# Altium PCB PCB2.PcbDoc (part 1 of 2)
Units mm, origin at the board's own origin, x right, y up, seen from the top; angles counter-clockwise.
Board outline 46.9 x 46.9 mm, 4 copper layers (Top Layer, Internal Plane 1, Signal Layer 2, Bottom Layer), stack 0.778 mm thick; 115 components, 66 nets, 371 pads, 999 vias.
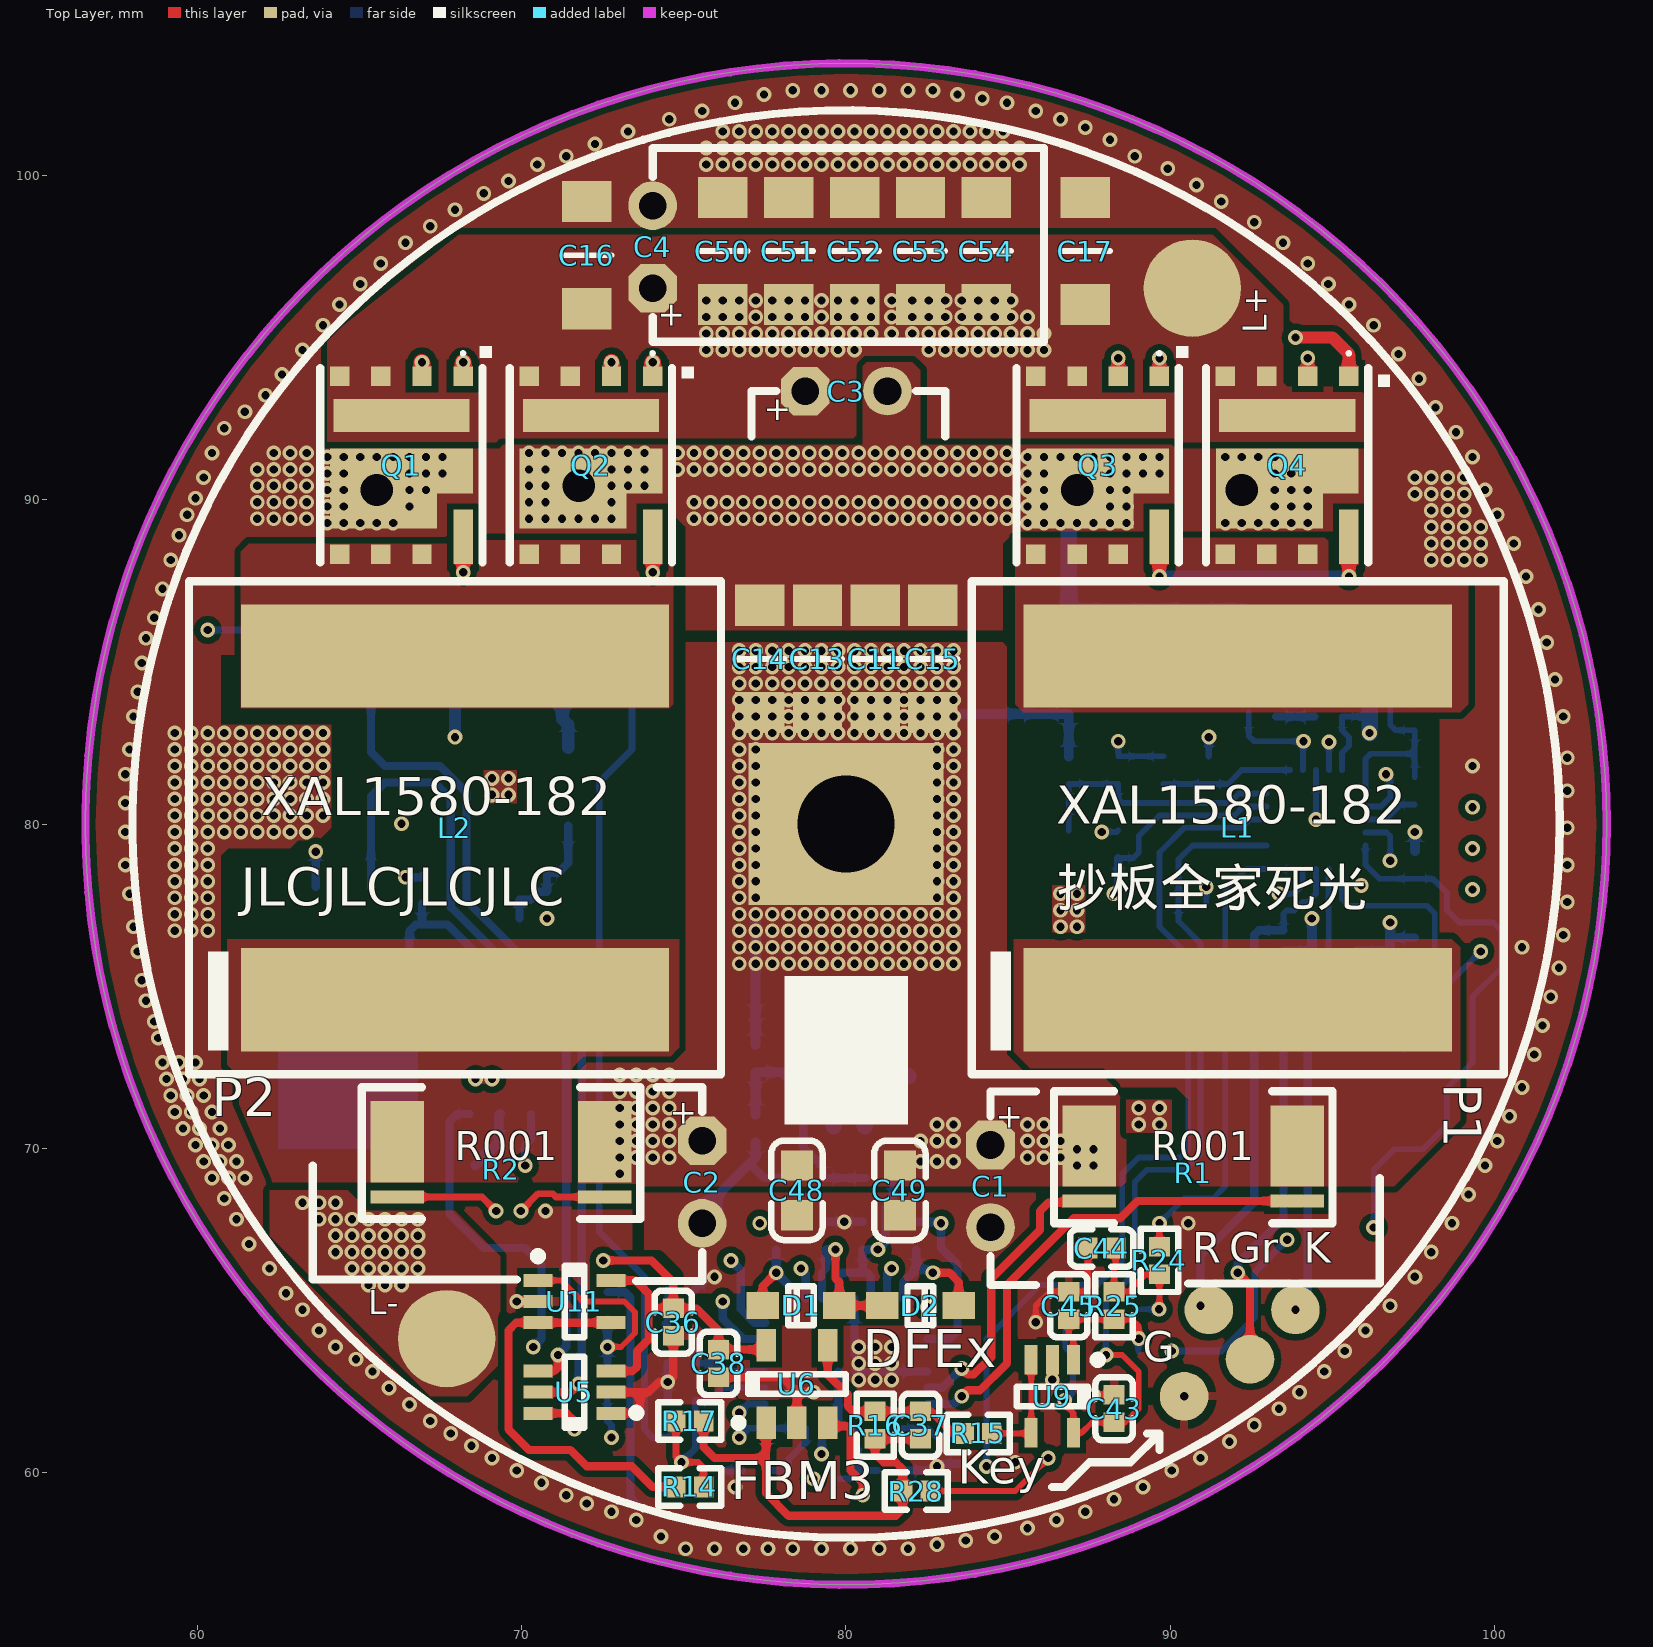
[diagram p0: Top Layer view]
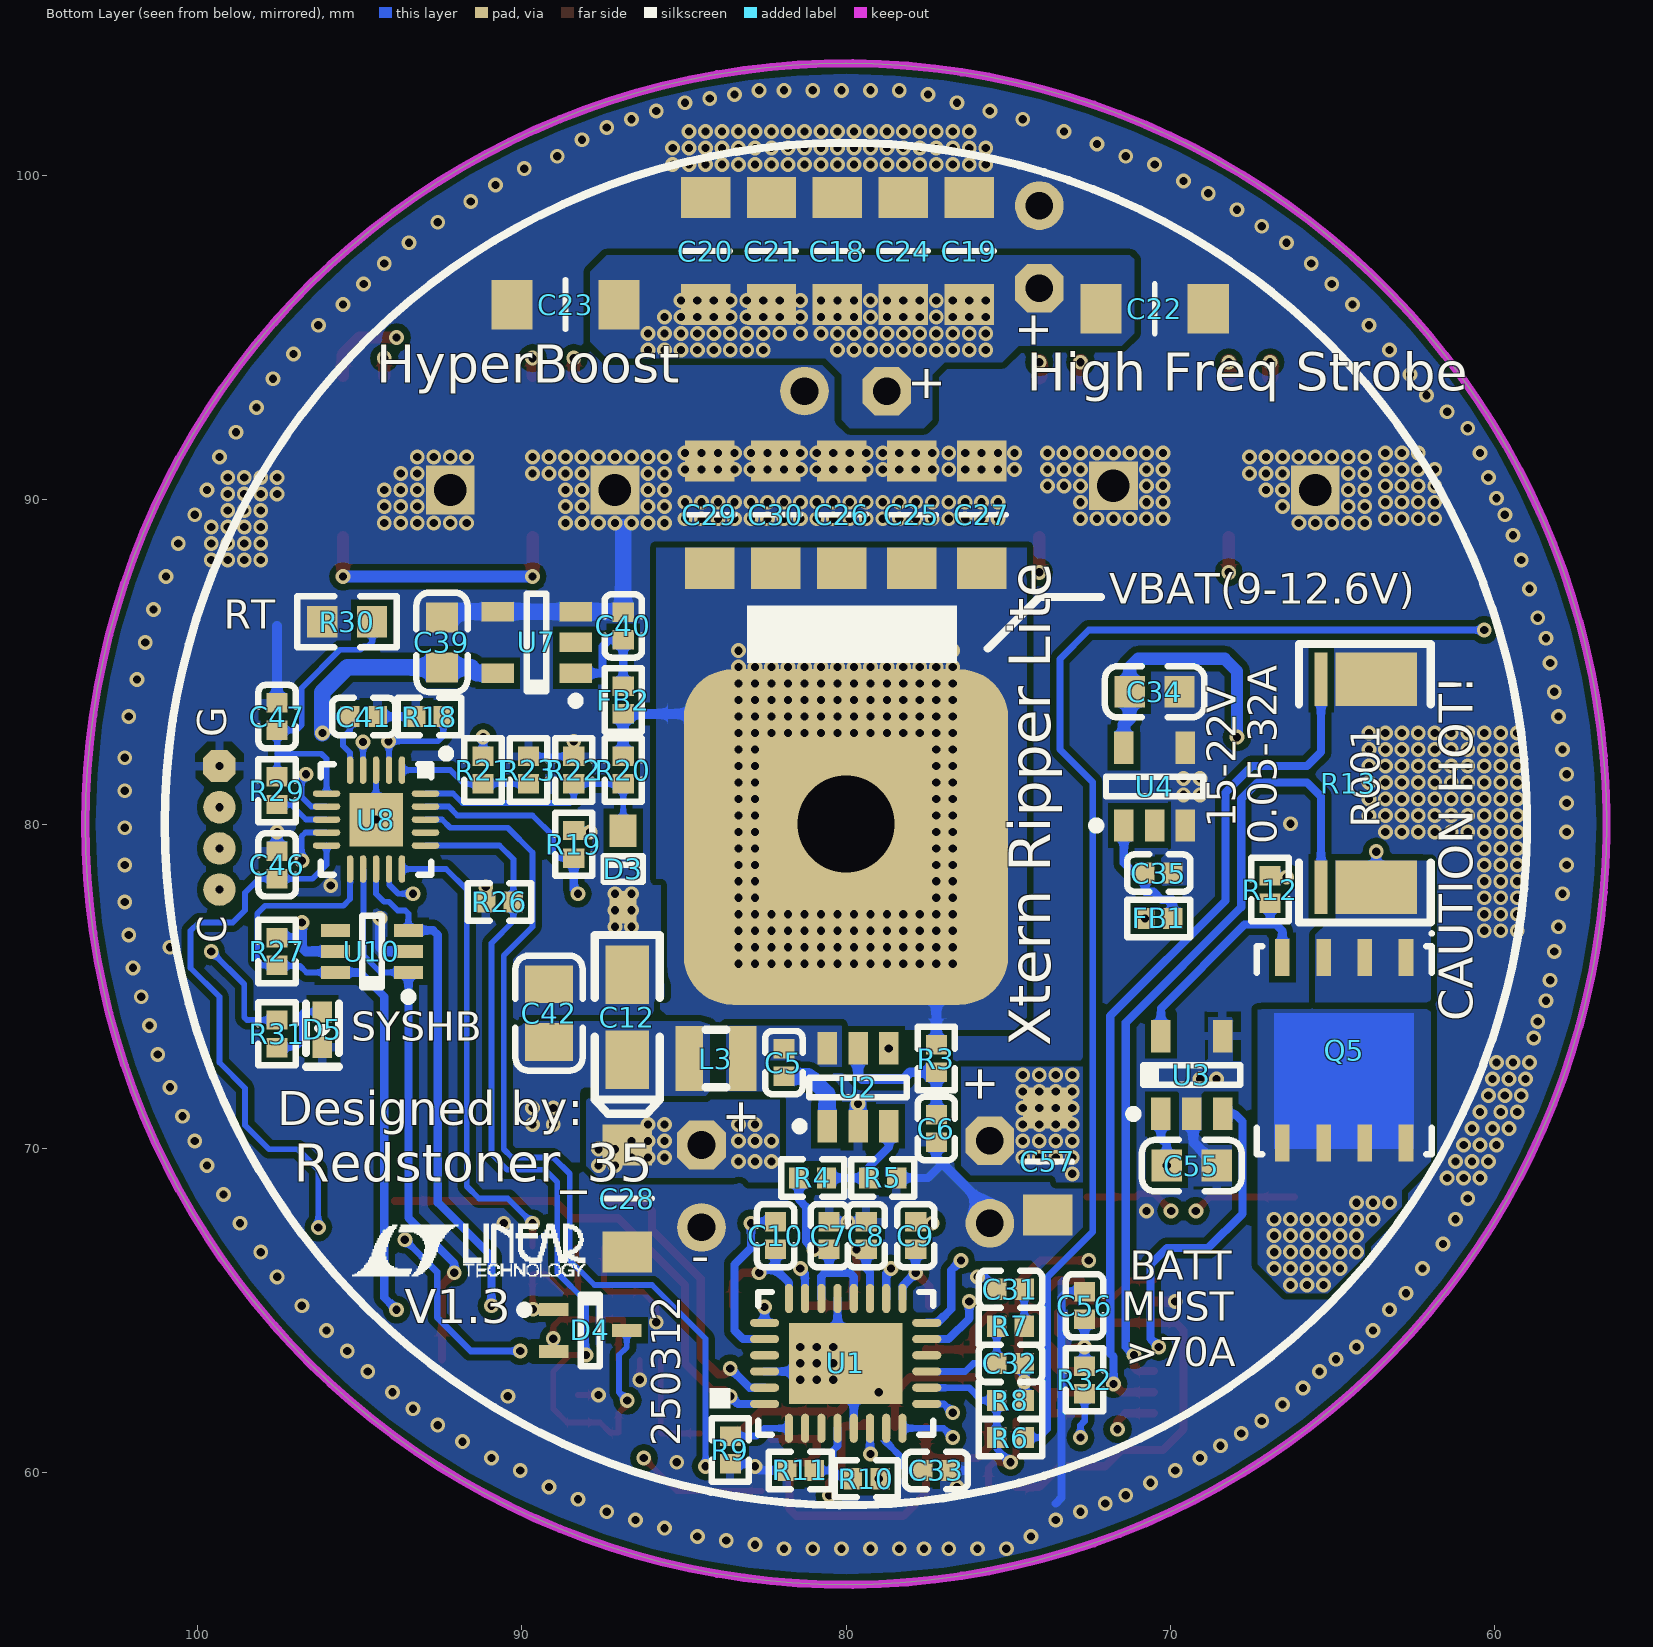
[diagram p1: Bottom Layer view, seen from below]
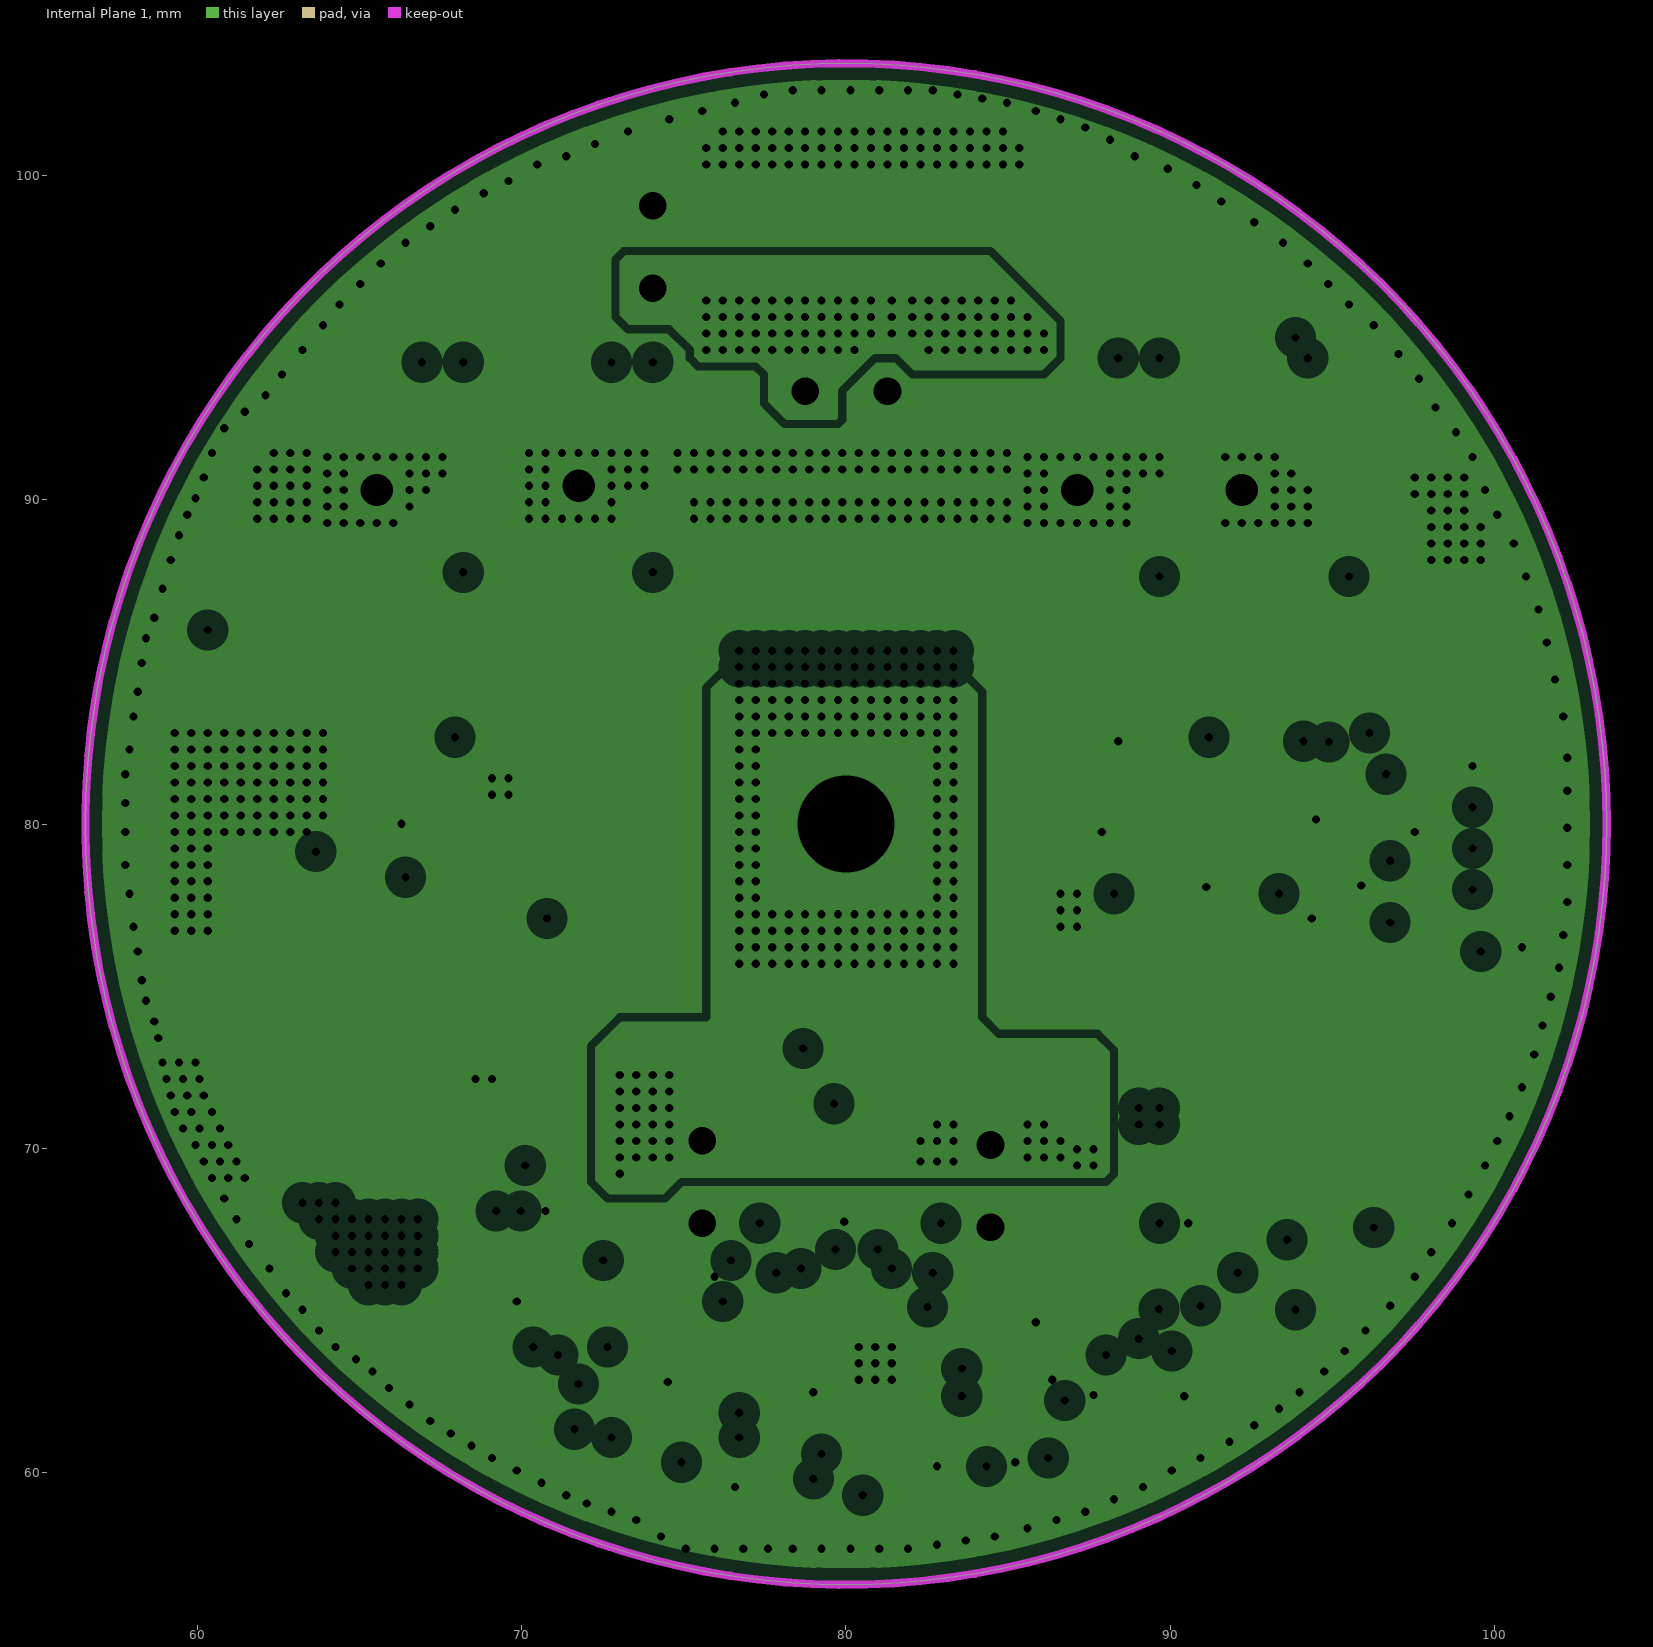
[diagram p2: Internal Plane 1, clearances drawn from the general rule]
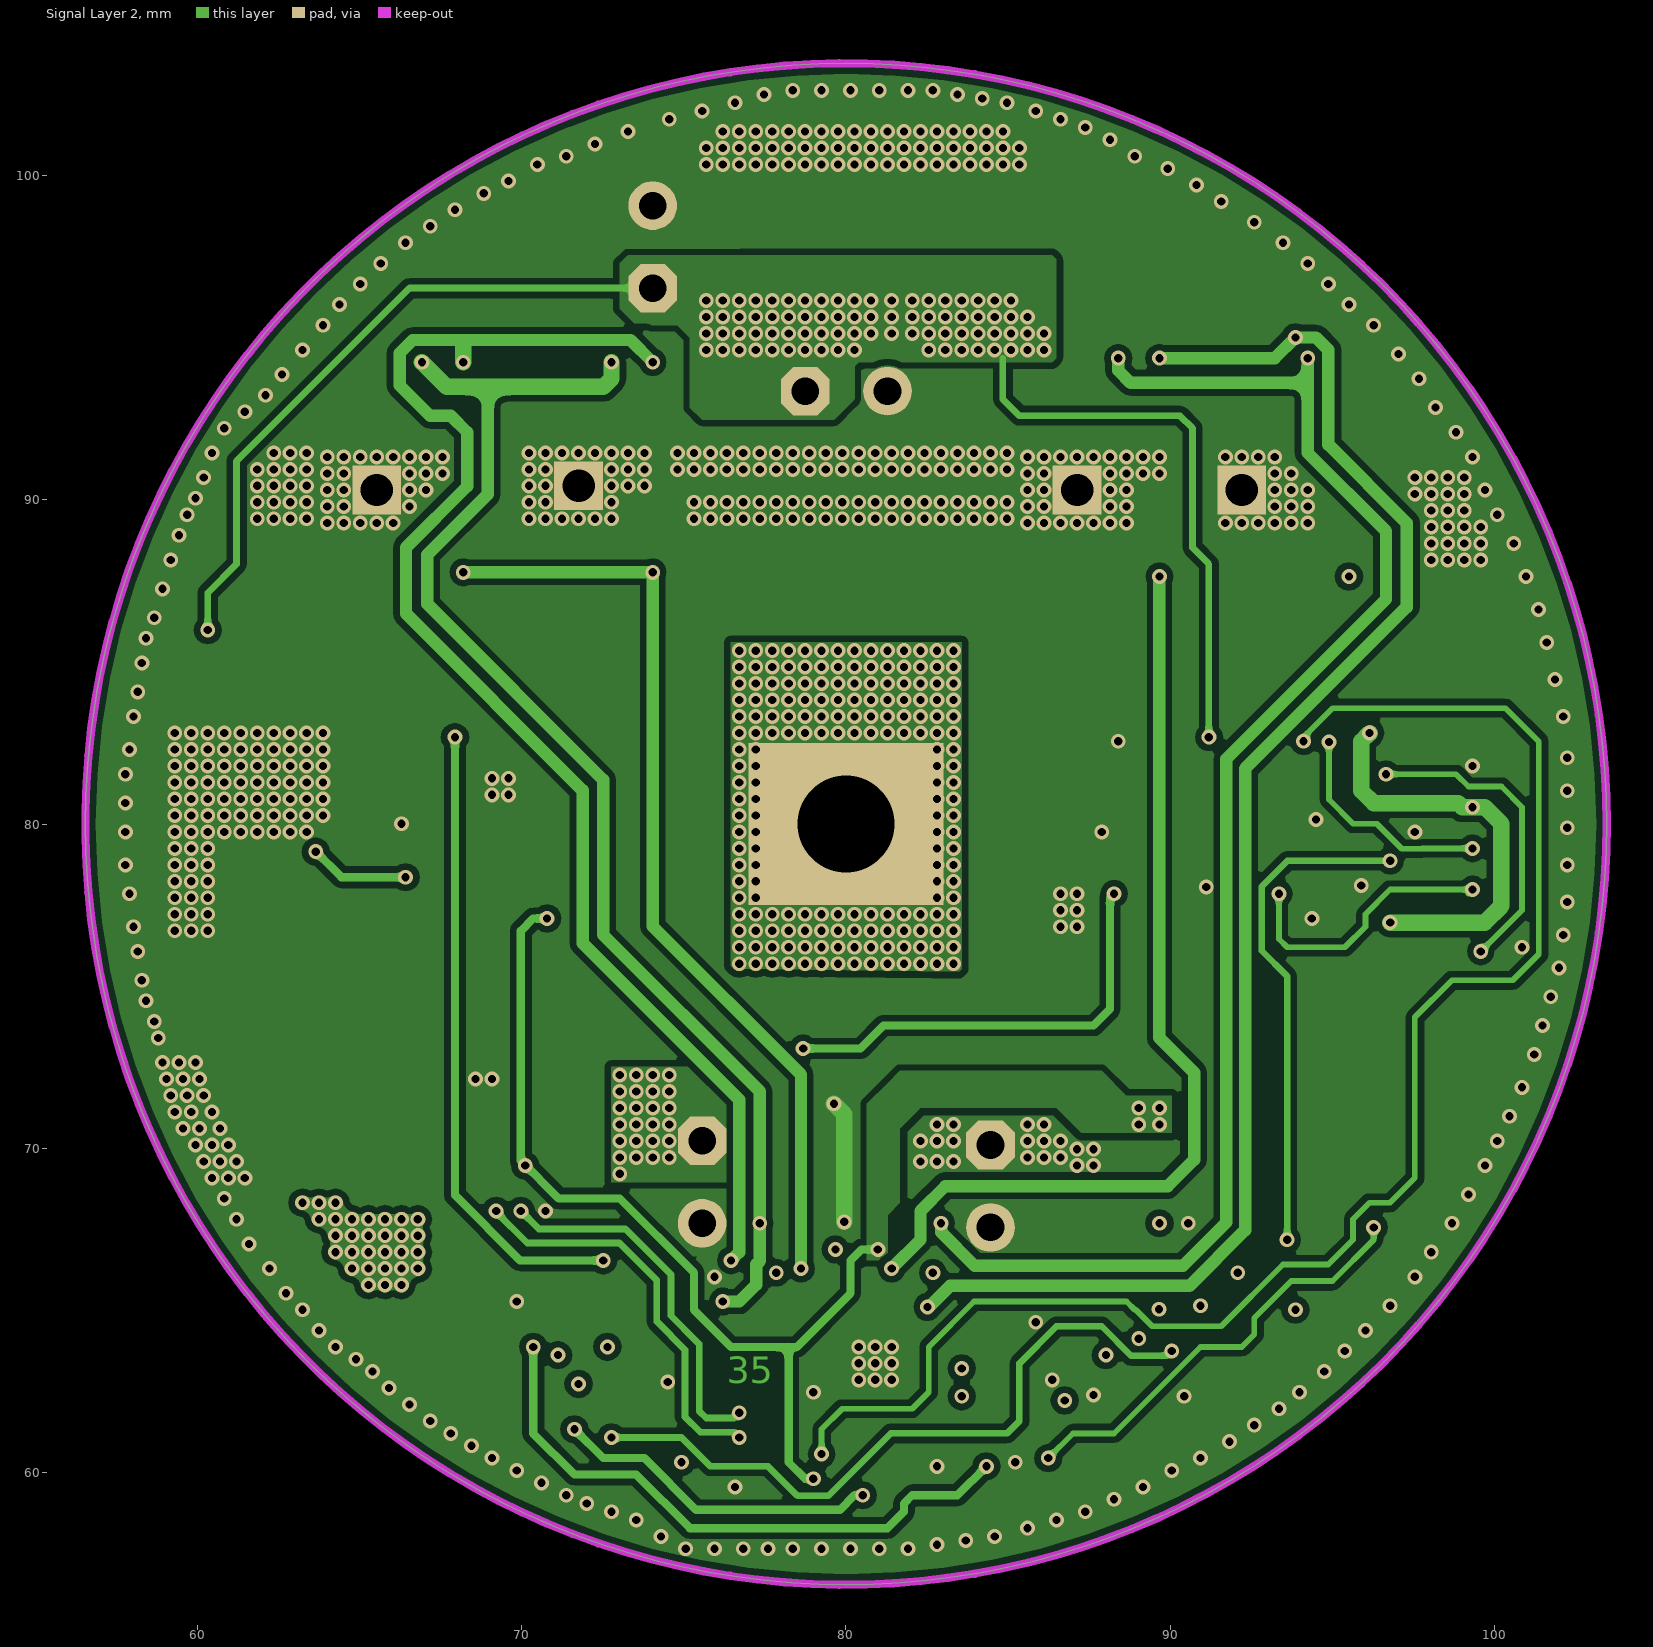
[diagram p3: Signal Layer 2]
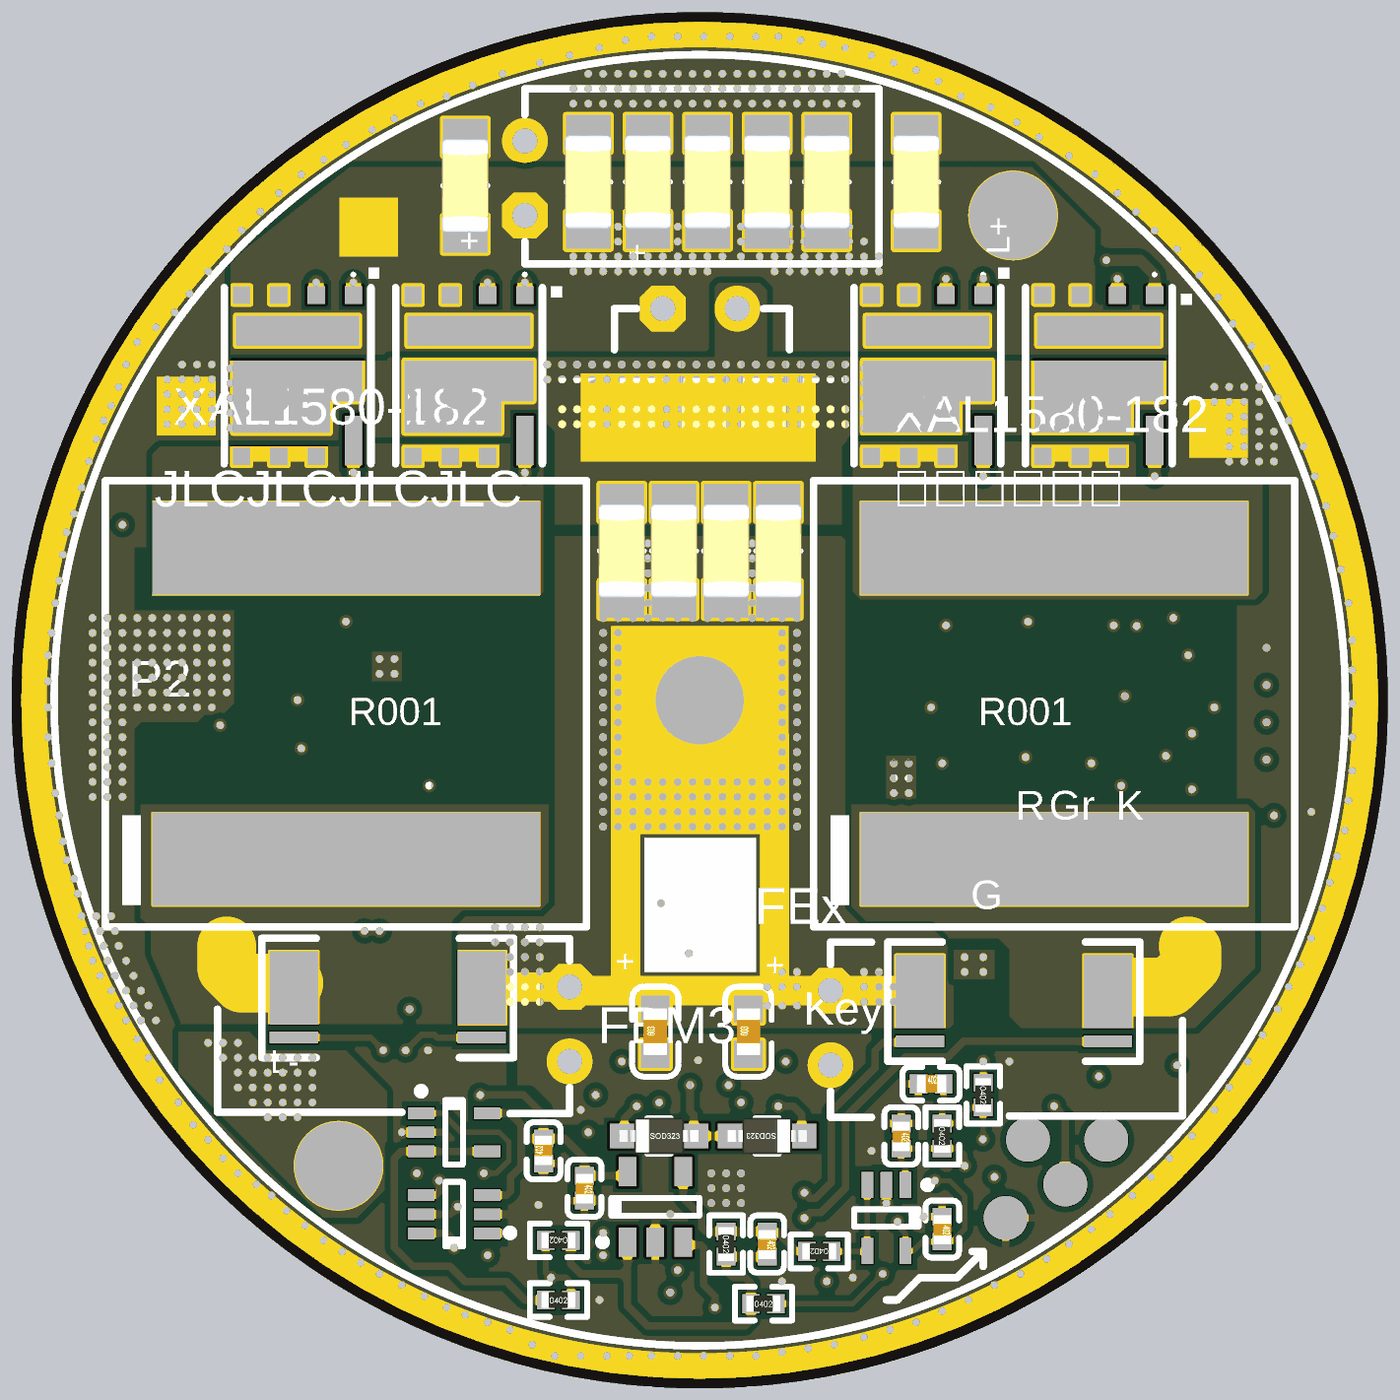
[diagram p5: 3D render of the assembled board from above, using the file's embedded part models]
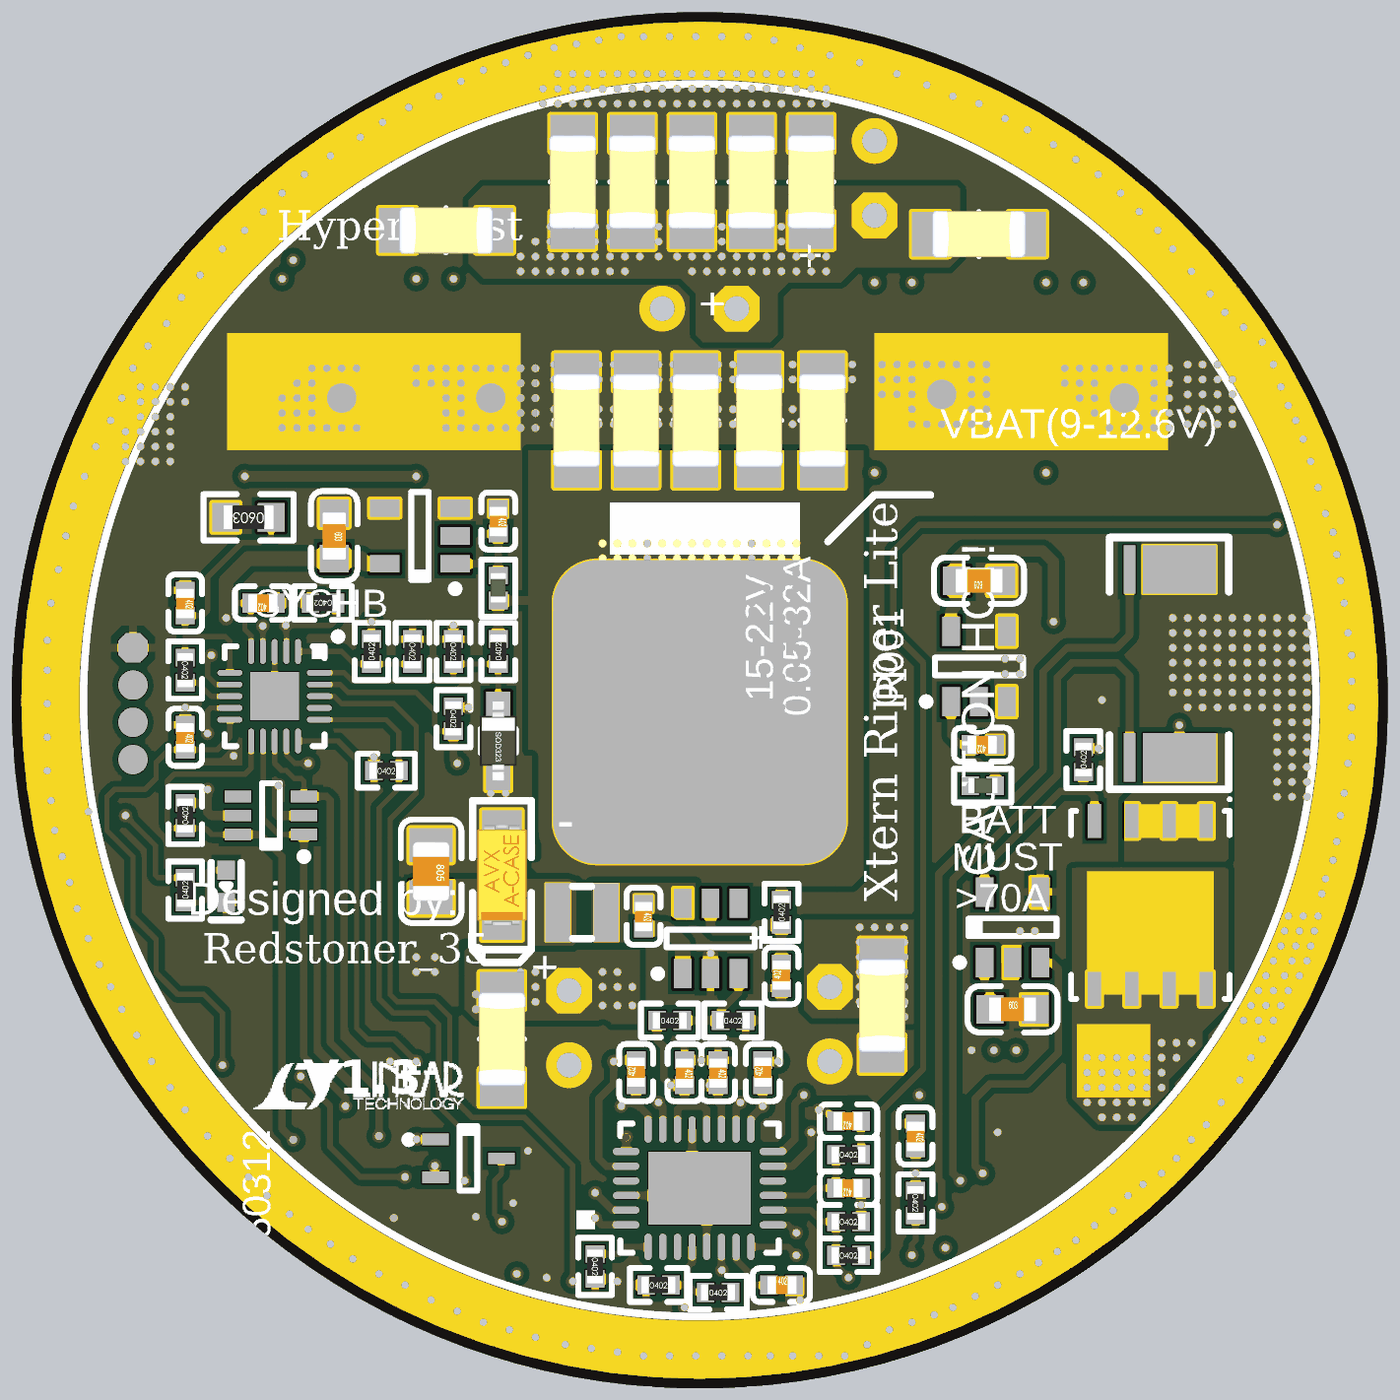
[diagram p6: 3D render of the assembled board from below, using the file's embedded part models]

## Layer stack, top to bottom
Top Solder: solder mask 0.0102, Solder Resist, Dk 3.5
Top Layer: signal copper 0.0356
Dielectric 1: core 0.254, FR-4, Dk 4.2
Internal Plane 1: plane copper 0.036
Dielectric 3: prepreg 0.127, Dk 4.2
Signal Layer 2: signal copper 0.036
Dielectric 2: core 0.254, Dk 4.2
Bottom Layer: signal copper 0.0356
Bottom Solder: solder mask 0.0102, Solder Resist, Dk 3.5

## Board outline
80,56.55 cw(c80,80) 56.55,80 cw(c80,80) 80,103.45 cw(c80,80) 103.45,80 cw(c80,80)

## Design rules (kind name [scope] priority, off if disabled: settings)
Clearance [All] p1: gap=0.2
DiffPairsRouting [All] p1: maxlimit=0.254 minlimit=0.203 mostfreqgap=0.229 toplayer_minwidth=0.203 toplayer_maxwidth=0.254 toplayer_prefwidth=0.254 midlayer2_minwidth=0.203 midlayer2_maxwidth=0.254 midlayer2_prefwidth=0.254 bottomlayer_minwidth=0.203 bottomlayer_maxwidth=0.254 bottomlayer_prefwidth=0.254 maxuncoupledlength=12.7
PlaneClearance [All] p1: clearance=0.508
PlaneConnect [All] p1: planeconnectstyle=Direct reliefexpansion=0.508 reliefentries=4 reliefconductorwidth=0.254 reliefairgap=0.254
PolygonConnect PolygonConnect_1 [IsVia] p1: connectstyle=Direct reliefconductorwidth=0.254 reliefentries=4 polygonreliefangle="90 Angle" airgapwidth=0.254
PolygonConnect [All] p2: connectstyle=Direct reliefconductorwidth=0.254 reliefentries=4 polygonreliefangle="90 Angle" airgapwidth=0.254
RoomDefinition main [InComponentClass('main')] p1: confinementstyle=ConfineIn formatcopy=TRUE lockcomponents=FALSE outline 178.943,26.924 244.983,26.924 244.983,46.482 178.943,46.482
RoutingVias [All] p1: holewidth=0.711 width=1.27 viastyle="Through Hole" minholewidth=0.711 minwidth=1.27 maxholewidth=0.711 maxwidth=1.27
SolderMaskExpansion [All] p1: expansion=0.102
Width [All] p1: maxlimit=5 minlimit=0.178 preferedwidth=0.254
27 further rules are at their usual default settings.

## Classes and differential pairs
differential pair LARGEIS: +LARGEIS_P -LARGEIS_N
differential pair IS1: +IS1_P -IS1_N
differential pair IS2: +IS2_P -IS2_N

## Components (designator, comment, footprint, x,y, rotation, side; value= is the part's Value field where it differs from the comment)
C1 "SPT1CM681F14OR" ElecCap_Hori#1 84.455,68.834 r0 top
C2 "SPT1CM681F14OR" ElecCap_Hori#2 75.565,68.961 r180 top
C3 "25V680uF BC" ElecCap_Hori#2 80.01,93.345 r270 top
C4 "PA25V470M6x12" ElecCap_Hori#2 74.041,97.79 r0 top
C5 "100nF (104) 10% 16V" 0402_C 81.915,72.644 r270 bottom
C6 "1.0uF (105) 10% 25V" 0402_C 77.216,70.612 r90 bottom
C7 "100nF (104) 10% 16V" 0402_C 80.518,67.31 r270 bottom
C8 "10uF (106) 20% 10V" 0402_C 79.375,67.31 r270 bottom
C9 "220nF (224) 10% 16V" 0402_C 77.851,67.31 r90 bottom
C10 "220nF (224) 10% 16V" 0402_C 82.169,67.31 r90 bottom
C11 "EMK316BBJ476ML-T" 1206C 80.899,85.09 r270 top
C12 "10uF (106) ±10% 16V" CASE-A_3216 86.741,74.041 r270 bottom
C13 "EMK316BBJ476ML-T" 1206C 79.121,85.09 r270 top
C14 "EMK316BBJ476ML-T" 1206C 77.343,85.09 r270 top
C15 "EMK316BBJ476ML-T" 1206C 82.677,85.09 r270 top
C16 "C3216X5R1V226M160AC" 1206C 72.009,97.536 r270 top
C17 "C3216X5R1V226M160AC" 1206C 87.376,97.663 r270 top
C18 "C3216X5R1V226M160AC" 1206C 80.264,97.663 r270 bottom
C19 "C3216X5R1V226M160AC" 1206C 76.2,97.663 r270 bottom
C20 "C3216X5R1V226M160AC" 1206C 84.328,97.663 r270 bottom
C21 "C3216X5R1V226M160AC" 1206C 82.296,97.663 r270 bottom
C22 "C3216X5R1V226M160AC" 1206C 70.485,95.885 r0 bottom
C23 "C3216X5R1V226M160AC" 1206C 88.646,96.012 r180 bottom
C24 "C3216X5R1V226M160AC" 1206C 78.232,97.663 r270 bottom
C25 "EMK316BBJ476ML-T" 1206C 77.978,89.535 r270 bottom
C26 "EMK316BBJ476ML-T" 1206C 80.137,89.535 r270 bottom
C27 "EMK316BBJ476ML-T" 1206C 75.819,89.535 r270 bottom
C28 "EMK316BBJ476ML-T" 1206C 86.741,68.453 r90 bottom
C29 "EMK316BBJ476ML-T" 1206C 84.201,89.535 r270 bottom
C30 "EMK316BBJ476ML-T" 1206C 82.169,89.535 r270 bottom
C31 "6.8nF (682) 10% 50V" 0402_C 74.93,65.659 r0 bottom
C32 "1.2nF (122) 5% 50V" 0402_C 74.93,63.373 r0 bottom
C33 "47nF (473) 10% 50V" 0402_C 77.216,60.071 r180 bottom
C34 "10uF (106) 10% 10V" 0603_C 70.485,84.074 r0 bottom
C35 "100nF (104) 10% 16V" 0402_C 70.358,78.486 r0 bottom
C36 "100nF (104) 10% 16V" 0402_C 74.676,64.643 r90 top
C37 "150nF (154) 10% 16V" 0402_C 82.296,61.468 r270 top
C38 "100nF (104) 10% 16V" 0402_C 76.073,63.373 r270 top
C39 "10uF (106) 10% 10V" 0603_C 92.456,85.598 r270 bottom
C40 "100nF (104) 10% 16V" 0402_C 86.868,86.106 r270 bottom
C41 "100nF (104) 10% 16V" 0402_C 94.869,83.312 r0 bottom
C42 "22uF (226) 20% 25V" 0805_C 89.154,74.168 r270 bottom
C43 "100nF (104) 10% 16V" 0402_C 88.265,61.976 r270 top
C44 "1.0uF (105) 10% 25V" 0402_C 87.884,66.929 r0 top
C45 "1.0uF (105) 10% 25V" 0402_C 86.868,65.151 r270 top
C46 "100nF (104) 10% 16V" 0402_C 97.536,78.74 r270 bottom
C47 "1nF (102) 10% 50V" 0402_C 97.536,83.312 r270 bottom
C48 "4.7uF (475) 10% 16V" 0603_C 78.486,68.707 r90 top
C49 "4.7uF (475) 10% 16V" 0603_C 81.661,68.707 r90 top
C50 "C3216X5R1V226M160AC" 1206C 76.2,97.663 r270 top
C51 "C3216X5R1V226M160AC" 1206C 78.232,97.663 r270 top
C52 "C3216X5R1V226M160AC" 1206C 80.264,97.663 r270 top
C53 "C3216X5R1V226M160AC" 1206C 82.296,97.663 r270 top
C54 "C3216X5R1V226M160AC" 1206C 84.328,97.663 r270 top
C55 "4.7uF (475) 10% 16V" 0603_C 69.342,69.469 r180 bottom
C56 "1.0uF (105) 10% 25V" 0402_C 72.644,65.151 r270 bottom
C57 "EMK316BBJ476ML-T" 1206C 73.787,69.596 r90 bottom
D1 "1N5819WS S4" SOD-323 78.613,65.151 r0 top
D2 "1N5819WS S4" SOD-323 82.296,65.151 r180 top
D3 "1N4148WS T4" SOD-323 86.868,78.613 r270 bottom
D4 "BAV70W A4" SC70-3 87.884,64.389 r180 bottom locked
D5 "蓝色" LED-0402 96.139,73.66 r270 bottom
FB1 "EBMS100505A050" 0402_L 70.358,77.089 r180 bottom
FB2 "EBMS100505A050" 0402_L 86.868,83.82 r90 bottom
L1 "XAL1580-182ME" XAL1580_xxxME 92.075,79.883 r90 top locked
L2 "XAL1580-182ME" XAL1580_xxxME 67.945,79.883 r90 top locked
L3 "SWPA252012S4R7MT" SWPA252010S 84.836,72.771 r180 bottom
Q1 "SIZF918BDT-T1-GE3" AOE6936 66.294,91.059 r180 top
Q2 "SIZF918BDT-T1-GE3" AOE6936 72.136,91.059 r180 top
Q3 "SIZF918BDT-T1-GE3" AOE6936 87.757,91.059 r180 top
Q4 "SIZF918DT-T1-GE3" AOE6936 93.599,91.059 r180 top
Q5 "IAUC120N04S6L005ATMA1" SON/DFN5x6(MOS) 64.643,73.025 r270 bottom
R1 "BVT-M-R001-1.0" 2512-Virtual4Wire 87.503,69.977 r0 top
R2 "BVT-M-R001-1.0" 2512-Virtual4Wire 66.167,70.104 r0 top
R3 "1Ω (1R00) ±1%" 0402_R 77.216,72.771 r90 bottom
R4 "11KΩ (1002) ±1%" 0402_R 81.026,69.088 r180 bottom
R5 "1.2KΩ (1201) ±1%" 0402_R 78.867,69.088 r180 bottom
R6 "270KΩ (2703) ±1%" 0402_R 74.93,61.087 r180 bottom
R7 "9.1KΩ (9101) ±1%" 0402_R 74.93,64.516 r180 bottom
R8 "20KΩ (2002) ±1%" 0402_R 74.93,62.23 r180 bottom
R9 "51KΩ (5102) ±1%" 0402_R 83.566,60.706 r270 bottom
R10 "10KΩ (1002) ±1%" 0402_R 79.375,59.817 r180 bottom
R11 "4.7KΩ (4701) ±1%" 0402_R 81.407,60.071 r180 bottom
R12 "10KΩ (1002) ±1%" 0402_R 66.929,77.978 r90 bottom
R13 "BVT-M-R001-1.0" 2512-Virtual4Wire 63.754,84.455 r270 bottom
R14 "130KΩ (1303) ±1%" 0402_R 75.184,59.563 r0 top
R15 "1.5KΩ (1501) ±1%" 0402_R 84.074,61.214 r180 top
R16 "1.2MΩ (1204) ±1%" 0402_R 80.899,61.468 r270 top
R17 "91KΩ (9102) ±1%" 0402_R 75.184,61.595 r180 top
R18 "10KΩ (1002) ±1%" 0402_R 92.837,83.312 r0 bottom
R19 "10KΩ (1002) ±1%" 0402_R 88.392,79.375 r270 bottom
R20 "680K (6803) ±1%" 0402_R 86.868,81.661 r90 bottom
R21 "680KΩ (6803) ±1%" 0402_R 91.186,81.661 r90 bottom
R22 "100KΩ (1003) ±1%" 0402_R 88.392,81.661 r270 bottom
R23 "56KΩ (5602) ±1%" 0402_R 89.789,81.661 r270 bottom
R24 "10KΩ (1002) ±1%" 0402_R 89.662,66.548 r270 top
R25 "20KΩ (2002) ±1%" 0402_R 88.265,65.151 r270 top
R26 "10KΩ (1002) ±1%" 0402_R 90.678,77.597 r180 bottom
R27 "10KΩ (1002) ±1%" 0402_R 97.536,76.073 r90 bottom
R28 "1KΩ (1001) ±1%" 0402_R 82.169,59.436 r0 top
R29 "330KΩ (3303) ±1%" 0402_R 97.536,81.026 r270 bottom
R30 "SDNT1608X104F4250FTF" 0603_R 95.377,86.233 r0 bottom
R31 "2KΩ (2001) ±1%" 0402_R 97.536,73.533 r90 bottom
R32 "4.7KΩ (4701) ±1%" 0402_R 72.644,62.865 r270 bottom
U1 "LTC3787IUFD" UFD-QFN28 80.01,63.373 r90 bottom locked
U2 "SY8120B1ABC" SOT95P245X110-6N 79.629,71.882 r90 bottom
U3 "UCC27517ADBVR" SOT95P245X110-5N 69.342,72.263 r90 bottom
U4 "TPS7B6950DBVR" SOT95P245X110-5N 70.485,81.153 r90 bottom
U5 "INA214AIDCKR" SC70-6 71.628,62.484 r180 top locked
U6 "TSZ121IYLT" SOT95P245X110-5N 78.486,62.738 r90 top
U7 "TPS7B6950DBVR" SOT95P245X110-5N 89.535,85.598 r0 bottom
U8 "CMS8S6990NA-QFN20" QFN40P300X300X800_HS-21N 94.488,80.137 r270 bottom locked
U9 "TSZ121ICT" SC70-5 86.36,62.357 r270 top
U10 "CH412K" SC70-6 94.615,76.073 r0 bottom
U11 "LMV321IDCKR" SC70-5 71.628,65.278 r0 top

## Footprints (in the part's own frame and the unit in brackets; to place one, negate y for a bottom-side part, rotate by r counter-clockwise, add the part's x,y. Pads: shape width x height; smd on the part's side, far side on the other; paste and mask are expansions set on the pad)
0402_C [mm]
  rect 0.6x0.65 smd mask+0.051: 1(-0.425,0) 2(0.425,0)
  silkscreen extent -0.97,-0.58 0.97,0.58, body extent -0.48,-0.3 0.52,0.3, height 0.2
0402_L [mm]
  rect 0.6x0.65 smd mask+0.051: 1(-0.425,0) 2(0.425,0)
  silkscreen extent -0.97,-0.58 0.97,0.58, body extent -0.51,-0.26 0.54,0.26, height 0.36
0402_R [mm]
  rect 0.6x0.65 smd mask+0.051: 1(-0.425,0) 2(0.425,0)
  silkscreen extent -0.97,-0.58 0.97,0.58, body extent -0.57,-0.27 0.58,0.28, height 0.41
0603_C [mm]
  rect 0.93x0.98 smd: 1(-0.77,0) 2(0.77,0)
  silkscreen extent -1.53,-0.79 1.54,0.79, body extent -0.8,-0.4 0.8,0.4, height 0.3
0603_R [mm]
  rect 0.93x0.98 smd: 1(-0.77,0) 2(0.77,0)
  silkscreen extent -1.53,-0.79 1.54,0.79, body extent -0.85,-0.4 0.85,0.4, height 0.56
0805_C [mm]
  rect 1.16x1.47 smd: 1(-0.89,0) 2(0.89,0)
  silkscreen extent -1.77,-1.04 1.77,1.04, body extent -1,-0.62 1,0.62, height 0.77
1206C [mil]
  rect 50x60 smd: 1(-65,0) 2(65,0)
  silkscreen extent 0,-30 0,30, body extent -63,-31 63,31, height 37
2512-Virtual4Wire [mm] "2512 Shunt Resistor Virtual 4Wire Connection"
  rect 1.65x2.5 smd mask+0.05: 0(0,0.1) 1(6.401,0.1)
  rect 1.65x0.4 smd mask+0.05: 2(0,-1.6) 3(6.401,-1.6)
  silkscreen extent -1.09,-2.28 7.49,1.78, body extent 0,-1.78 6.48,1.4, height 1
AOE6936 [mm]
  rect 0.6x0.6 smd: 1(-1.905,-2.75) 2(-0.635,-2.75) 3(0.635,-2.75) 4(1.905,-2.75) 5(1.905,2.75) 6(0.635,2.75) 7(-0.635,2.75)
  rect 0.6x1.68 smd: 8(-1.905,2.21)
  rect 4.2x1.03 smd: 9(0,-1.535)
  rect 4.4x1.39 smd: 10(0,0.175)
  rect 3.3x1.08 smd: 10(0.55,1.41)
  silkscreen extent -2.5,-3.5 2.5,3, body extent -2.54,-3.05 2.54,3.05, height 0.75
CASE-A_3216 [mm]
  rect 1.8x1.35 smd: 1(1.31,0) 2(-1.31,0)
  silkscreen extent -2.54,-1 2.97,1, body extent -1.7,-0.84 1.7,0.84, height 1.71
ElecCap_Hori#1 [mm] "水平安装的电容 6x12mm"
  oct 1.5x1.5 hole 0.85 mask+0.03: 1(0,1.27)
  round 1.5 hole 0.85 mask+0.03: 2(0,-1.27)
  silkscreen extent 0,-3.05 1.4,2.92
ElecCap_Hori#2 [mm] "水平安装的电容 6x12mm"
  oct 1.5x1.5 hole 0.85 mask+0.03: 1(0,-1.27)
  round 1.5 hole 0.85 mask+0.03: 2(0,1.27)
  silkscreen extent 0,-2.92 1.4,3.05
LED-0402 [mm] "0402贴片LED"
  rect 0.651x0.6 smd mask+0.03: A(-0.55,0) K(0.55,0)
  silkscreen extent -0.8,-0.51 1.14,0.51, body extent -0.55,-0.51 0.59,0.51, height 1
QFN40P300X300X800_HS-21N [mm] "QFN, 20-Leads, Body 3.00x3.00mm, Pitch 0.40mm, Thermal Pad 1.65x1.65mm, IPC Medium Density"
  oval 0.85x0.2 smd mask+0.03: 1(-1.525,0.8) 2(-1.525,0.4) 3(-1.525,0) 4(-1.525,-0.4) 5(-1.525,-0.8) 11(1.525,-0.8) 12(1.525,-0.4) 13(1.525,0) 14(1.525,0.4) 15(1.525,0.8)
  oval 0.2x0.85 smd mask+0.03: 6(-0.8,-1.525) 7(-0.4,-1.525) 8(0,-1.525) 9(0.4,-1.525) 10(0.8,-1.525) 16(0.8,1.525) 17(0.4,1.525) 18(0,1.525) 19(-0.4,1.525) 20(-0.8,1.525)
  rect 1.65x1.65 smd mask+0.03: 21(0,0)
  silkscreen extent -2.16,-1.7 1.7,2.29, body extent -1.55,-1.55 1.55,1.55, height 0.8
SC70-3 [mm] "3 Lead SC70(SOT-323) package for small Transistor"
  rect 0.9x0.4 smd mask+0.05: 1(-1.125,0.65) 2(-1.125,-0.65) 3(1.125,0)
  silkscreen extent -2.16,-1.1 0.3,1.1, body extent -0.67,-1.1 0.67,1.1, height 1.1
SC70-5 [mm] "SOT23, 6-Leads, Body 2.00x2.10mm, Pitch 0.65mm, IPC Medium Density"
  rect 0.9x0.4 smd mask+0.05: 1(-1.125,0.65) 2(-1.125,0) 3(-1.125,-0.65) 4(1.125,-0.65) 5(1.125,0.65)
  silkscreen extent -1.25,-1.1 0.3,1.53, body extent -0.67,-1.1 0.67,1.1, height 1.1
SC70-6 [mm] "SOT23, 6-Leads, Body 2.00x2.10mm, Pitch 0.65mm, IPC Medium Density"
  rect 0.9x0.4 smd mask+0.05: 1(-1.125,0.65) 2(-1.125,0) 3(-1.125,-0.65) 4(1.125,-0.65) 5(1.125,0) 6(1.125,0.65)
  silkscreen extent -2.03,-1.1 0.3,1.1, body extent -0.67,-1.1 0.67,1.1, height 1.1
SOD-323 [mm]
  rect 1x0.83 smd: 1(1.18,0) 2(-1.18,0)
  silkscreen extent -0.4,-0.6 0.4,0.6, body extent -1.35,-0.62 1.35,0.63, height 1.1
SON/DFN5x6(MOS) [mm] "SON, 8-Leads, Body 5.00x6.00mm, Pitch 1.27mm, Thermal Pad 4.00x3.53mm, IPC Low Density"
  rect 1.15x0.45 smd: 1(-2.86,1.905) 2(-2.86,0.635) 3(-2.86,-0.635) 4(-2.86,-1.905) 5(2.86,-1.905) 6(2.86,-0.635) 7(2.86,0.635) 8(2.86,1.905)
  Top Layer region: -1.143,2.159 3.048,2.159 3.048,-2.159 -1.143,-2.159
  silkscreen extent -3.65,-2.7 3.2,2.75, body extent -3.05,-2.55 3.05,2.55, height 1.05
SOT95P245X110-5N [mm] "SOT23, 5-Leads, Body 2.90x2.45mm, Pitch 0.95mm, IPC Medium Density"
  rect 1x0.6 smd: 1(-1.2,0.95) 2(-1.2,0) 3(-1.2,-0.95) 4(1.2,-0.95) 5(1.2,0.95)
  silkscreen extent -1.32,-1.5 0.3,1.93, body extent -0.7,-1.5 0.7,1.5, height 1.1
SOT95P245X110-6N [mm] "SOT23, 6-Leads, Body 2.90x2.45mm, Pitch 0.95mm, IPC Medium Density"
  rect 1x0.6 smd: 1(-1.2,0.95) 2(-1.2,0) 3(-1.2,-0.95) 4(1.2,-0.95) 5(1.2,0) 6(1.2,0.95)
  silkscreen extent -1.32,-1.5 0.3,1.93, body extent -0.7,-1.5 0.7,1.5, height 1.1
SWPA252010S [mm] "小型绕线电感"
  rect 0.85x2 smd mask+0.03: 1(0,0) 2(1.65,0)
  silkscreen extent 0.51,-0.89 1.14,0.89, body extent -0.13,-1.02 1.78,1.02, height 3.06
UFD-QFN28 [mm] "QFN, 28-Leads, Body 4.00x5.00mm, Pitch 0.50mm, Thermal Pad 2.50x3.50mm, IPC Medium Density"
  oval 0.9x0.25 smd mask+0.02: 1(-2,1.75) 2(-2,1.25) 3(-2,0.75) 4(-2,0.25) 5(-2,-0.25) 6(-2,-0.75) 7(-2,-1.25) 8(-2,-1.75) 15(2,-1.75) 16(2,-1.25) 17(2,-0.75) 18(2,-0.25) 19(2,0.25) 20(2,0.75) 21(2,1.25) 22(2,1.75)
  oval 0.25x0.9 smd mask+0.02: 9(-1.25,-2.5) 10(-0.75,-2.5) 11(-0.25,-2.5) 12(0.25,-2.5) 13(0.75,-2.5) 14(1.25,-2.5) 23(1.25,2.5) 24(0.75,2.5) 25(0.25,2.5) 26(-0.25,2.5) 27(-0.75,2.5) 28(-1.25,2.5)
  rect 2.5x3.5 smd mask+0.02: 29(0,0)
  silkscreen extent -2.2,-2.7 2.2,2.7, body extent -2.05,-2.55 2.05,2.55, height 0.8
XAL1580_xxxME [mm] "ColiCraft XAL1580Series Inductor"
  rect 3.18x13.2 smd mask+0.03: 1(-5.3,0) 2(5.3,0)
  silkscreen extent -7.6,-8.2 7.6,8.2, body extent -7.62,-8.25 7.62,8.25, height 8

## Part data
C1 C2: library part CAP2, "直插固态电容，耐压16V容量680uF，尺寸6x11"
C3: library part CAP2, "绿宝石直插固态电容 680uF 25V BC系列，体积6x15"
C4: library part CAP2, "105°C 2000Hrs 直插固态电容。耐压25V容量470uF，尺寸D6.3mmxL12mm"
C5 C7 C33 C35 C36 C37 C38 C40 C41 C43 C46: library part "0402 100nF (104) 10% 16V", "贴片电容"
C6 C44 C45 C56: library part "0402 1.0uF (105) 10% 25V", "贴片电容"
C8: library part "0402 10uF (106) 20% 6.3V", "贴片电容"
C9 C10: library part "0402 220nF (224) 10% 16V", "贴片电容"
C11 C13 C14 C15 C25 C26 C27 C28 C29 C30 C57: library part Cap, "1206尺寸太诱MLCC 16V 47uF X5R ±20%"
C12: library part "3216 10uF (106) 10% 16V", "钽电容"
C16 C17 C18 C19 C20 C21 C22 C23 C24 C50 C51 C52 C53 C54: library part Cap, "1206尺寸TDK MLCC 35V 22uF"
C31: library part "0402 6.8nF (682) 10% 50V", "贴片电容"
C32: library part "0402 100pF (101) 5% 50V", "贴片电容"
C34 C39: library part "0603 10uF (106) 10% 10V", "贴片电容"
C42: library part "0805 22uF (226) 20% 25V", "贴片电容"
C47: library part "0402 1nF (102) 10% 50V", "贴片电容"
C48 C49 C55: library part "0603 4.7uF (475) 10% 16V", "贴片电容"
D1 D2 D3: library part "SOD-323 1N4148WS T4", "二极管"
D4: library part "SOT-23 BAV70 A4", "开关二极管"
D5: library part LED0402, "0402(1005)贴片发光二极管"
FB1 FB2: library part "0402 12nH  5%", "贴片磁珠 200mA 5R±25% 100MHz"
L1 L2: library part "Inductor Iron", "线艺XAL系列电感"
L3: library part "Inductor Iron", "线绕功率电感 2.5x2.0mm尺寸 1.2mm高度"
Q1 Q2 Q3 Q4: library part AOE6936, "30V Dual N-Channel 30 V (D-S) MOSFET With Schottky Diodes 3.6/1.5mΩ RdsON"
Q5: library part "SON/DFN5x6 MOS", "0.5mΩ 120A 40V OptiMOS 6 车规级MOSFET"
R1 R2 R13: library part shunt, "德国伊萨精密检流电阻，2512 1mΩ±1% 锰铜材质 <50ppm/K P70℃=3W"
R3: library part "0402 1Ω (1R00) 1%", "贴片电阻"
R4 R5 R7 R10 R12 R18 R19 R24 R26 R27: library part "0402 10KΩ (1002) 1%", "贴片电阻"
R6 R14 R17 R22 R23: library part "0402 100KΩ (1003) 1%", "贴片电阻"
R8: library part "0402 18KΩ (1802) 1%", "贴片电阻"
R9: library part "0402 56KΩ (5602) 1%", "贴片电阻"
R11: library part "0402 4.7KΩ (4701) 1%", "贴片电阻"
R15: library part "0402 470Ω (4700) 1%", "贴片电阻"
R16: library part "0402 1MΩ (1004) 1%", "贴片电阻"
R20: library part "0402 680Ω (6800) 1%", "贴片电阻"
R21: library part "0402 470KΩ (4703) 1%", "贴片电阻"
R25 R32: library part "0402 20KΩ (2002) 1%", "贴片电阻"
R28: library part "0402 1KΩ (1001) 1%", "贴片电阻"
R29: library part "0402 330KΩ (3303) 1%", "贴片电阻"
R30: library part "0603 100KΩ (1003) 1%", "0603贴片NTC热敏电阻，100KΩ (1003) ±1% B4250"
R31: library part "0402 2KΩ (2001) 1%", "贴片电阻"
U1: "PolyPhase Synchronous Boost Controller for 2 Phases"
U2: library part SY8120, "2A输出电流，18V耐压同步降压转换器，SOT-23-6封装"
U3: "4A Gate Driver SOT-23 Low side"
U4 U7: library part TPS7B6933DBVR, "150mA 40V max input Ultra low Iq LDO,fixed 5V output"
U5: library part INA199A2DCKR, "100V/V增益 26V最高共模电压，高低测通用双向高精度检流放大器 SC70-6封装"
U6: library part TLV333IDBVR, "高精度零漂移低功耗5V运放 400Khz GBW SOT23-5封装"
U8: library part CM8S6990NA-QFN20, "增强型闪存1T 8051单片机，16KB Flash 256+1K XRAM"
U9: library part LMV321IDCKR, "高精度零漂移低功耗5V运放 400Khz GBW SC70-5封装"
U10: "very low capacity quad IO ESD protection Array"
U11: "CMOS超小型运算放大器，SC70-5"

## Free pads (board coordinates)
  rect 1.5x1.5 hole 1 mask+0.03: 0(65.532,90.297) 0(71.755,90.424) 0(87.122,90.297) 0(92.202,90.297)
  round 1 smd far side mask+0.03: 0(99.314,77.978) 1(99.314,80.518) 2(99.314,79.248)
  oct 1x1 smd far side mask+0.03: 2(99.314,81.788)
  rect 6x5 hole 3 mask+0.03: 4(80,80)
  round 1.5 smd mask+0.03: 4(90.424,62.357) 4(91.186,65.024) 4(92.456,63.5) 4(93.853,65.024)
  round 3 smd mask+0.03: 5(90.678,96.52) 6(67.691,64.135)
  rrect30% 10x10.35 smd far side mask+0.05: 6(80,79.6)

## Via types
v1: diameter 0.457, hole 0.254, Top Layer to Bottom Layer, tented both sides, 999 vias

## Nets (pads, with @x,y where several pads share a name; then routed paths per layer and width w, separated by ;. In a path a pad name is that pad's centre, name@x,y a point inside that pad or via, vN(x,y) a via of type N, cw(c..) or ccw(c..) an arc to the next point about the centre after c; other vN are vias at no path point)
5VFB: C34.2 C36.2 C38.1 U4.5 U5.3 U6.5 U11.5 | length 40.1
  Top Layer w0.254: v1(72.517,66.548) 74.001,66.548 74.676,65.873 C36.2@74.676,65.068 ; U5.3@72.753,63.134 73.421,63.134 73.554,63.267 73.554,63.754 73.914,64.114 73.914,64.897 ; U11.5@72.753,65.928 73.518,65.928 73.914,65.532 73.914,64.897 ; U6.5@77.536,63.811 77.523,63.798 C38.1@76.073,63.798 76.073,64.389 75.394,65.068 C36.2@74.676,65.068 ; 73.914,64.897 74.085,65.068 C36.2@74.676,65.068
  Signal Layer 2 w0.254: v1(67.945,82.677) 67.945,68.556 69.953,66.548 v1(72.517,66.548)
  Bottom Layer w0.381: v1(67.945,82.677) 67.945,84.709 68.326,85.09 70.993,85.09 71.255,84.828 C34.2@71.255,84.074 71.255,83.238 71.435,83.058 U4.5@71.435,82.353
6V0: C7.2 C12.1 C42.2 C55.1 FB1.1 L3.1 R4.1 R10.2 U1.18 U1.20 U3.1 | length 36.3
  Signal Layer 2 w0.254: v1(70.783,77.089) 70.358,77.089 69.977,76.708 69.977,69.62 71.144,68.453 73.025,68.453 75.311,66.167 75.311,65.024 76.454,63.881 78.232,63.881 ; v1(78.994,59.817) 78.74,59.817 78.232,60.325 78.232,63.881 ; v1(80.982,66.885) 80.474,66.885 80.137,66.548 80.137,65.532 78.486,63.881 78.232,63.881
  Bottom Layer w0.254: v1(70.112,69.469) 70.112,70.112 70.292,70.292 U3.1@70.292,71.063 ; R10.2@78.95,59.861 v1(78.994,59.817) ; U1.18@79.76,65.373 79.76,66.037 79.89,66.167 80.391,66.167 ; U1.20@80.76,65.373 80.76,66.052 80.645,66.167 80.391,66.167 ; R4.1@81.451,69.088 81.451,68.422 81.228,68.199 81.228,67.131 v1(80.982,66.885) C7.2@80.518,66.885 80.518,66.294 80.391,66.167
  other v1: 89.027,70.739 89.662,70.739 89.027,71.247 89.662,71.247
12V: C1.1 C2.1 C11.2 C13.2 C14.2 C15.2 C25.2 C26.2 C27.2 C28.2 C29.2 C30.2 C48.2 C49.2 C57.2 FB2.1 pad.4@80,80 pad.6@80,79.6 R1.0 R2.1 R3.2 R20.2 | length 8.8
  Bottom Layer w0.305: R3.2@77.216,73.196 v1(77.216,77.216) ; pad.6@83.395,83.395 FB2.1@86.868,83.395 R20.2@86.868,82.086
  other v1: 73.025,69.215 87.122,69.469 87.63,69.469 82.296,69.596 82.804,69.596 83.312,69.596 73.025,69.723 73.533,69.723 74.041,69.723 74.549,69.723 85.598,69.723 86.106,69.723 86.614,69.723 87.122,69.977 87.63,69.977 73.025,70.231 73.533,70.231 74.041,70.231 74.549,70.231 82.296,70.231 82.804,70.231 83.312,70.231 85.598,70.231 86.106,70.231 86.614,70.231 73.025,70.739 73.533,70.739 74.041,70.739 74.549,70.739 82.804,70.739 83.312,70.739 85.598,70.739 86.106,70.739 73.025,71.247 73.533,71.247 74.041,71.247 74.549,71.247 73.025,71.755 73.533,71.755 74.041,71.755 74.549,71.755 73.025,72.263 73.533,72.263 74.041,72.263 74.549,72.263 76.708,75.692 77.216,75.692 77.724,75.692 78.232,75.692 78.74,75.692 79.248,75.692 79.756,75.692 80.264,75.692 80.772,75.692 81.28,75.692 81.788,75.692 82.296,75.692 82.804,75.692 83.312,75.692 76.708,76.2 77.216,76.2 77.724,76.2 78.232,76.2 78.74,76.2 79.248,76.2 79.756,76.2 80.264,76.2 80.772,76.2 81.28,76.2 81.788,76.2 82.296,76.2 82.804,76.2 83.312,76.2 76.708,76.708 77.216,76.708 77.724,76.708 78.232,76.708 78.74,76.708 79.248,76.708 79.756,76.708 80.264,76.708 80.772,76.708 81.28,76.708 81.788,76.708 82.296,76.708 82.804,76.708 83.312,76.708 76.708,77.216 77.724,77.216 78.232,77.216 78.74,77.216 79.248,77.216 79.756,77.216 80.264,77.216 80.772,77.216 81.28,77.216 81.788,77.216 82.296,77.216 82.804,77.216 83.312,77.216 76.708,77.724 77.216,77.724 82.804,77.724 83.312,77.724 76.708,78.232 77.216,78.232 82.804,78.232 83.312,78.232 76.708,78.74 77.216,78.74 82.804,78.74 83.312,78.74 76.708,79.248 77.216,79.248 82.804,79.248 83.312,79.248 76.708,79.756 77.216,79.756 82.804,79.756 83.312,79.756 76.708,80.264 77.216,80.264 82.804,80.264 83.312,80.264 76.708,80.772 77.216,80.772 82.804,80.772 83.312,80.772 76.708,81.28 77.216,81.28 82.804,81.28 83.312,81.28 76.708,81.788 77.216,81.788 82.804,81.788 83.312,81.788 76.708,82.296 77.216,82.296 82.804,82.296 83.312,82.296 76.708,82.804 77.216,82.804 77.724,82.804 78.232,82.804 78.74,82.804 79.248,82.804 79.756,82.804 80.264,82.804 80.772,82.804 81.28,82.804 81.788,82.804 82.296,82.804 82.804,82.804 83.312,82.804 76.708,83.312 77.216,83.312 77.724,83.312 78.232,83.312 78.74,83.312 79.248,83.312 79.756,83.312 80.264,83.312 80.772,83.312 81.28,83.312 81.788,83.312 82.296,83.312 82.804,83.312 83.312,83.312 76.708,83.82 77.216,83.82 77.724,83.82 78.232,83.82 78.74,83.82 79.248,83.82 79.756,83.82 80.264,83.82 80.772,83.82 81.28,83.82 81.788,83.82 82.296,83.82 82.804,83.82 83.312,83.82 76.708,84.328 77.216,84.328 77.724,84.328 78.232,84.328 78.74,84.328 79.248,84.328 79.756,84.328 80.264,84.328 80.772,84.328 81.28,84.328 81.788,84.328 82.296,84.328 82.804,84.328 83.312,84.328 76.708,84.836 77.216,84.836 77.724,84.836 78.232,84.836 78.74,84.836 79.248,84.836 79.756,84.836 80.264,84.836 80.772,84.836 81.28,84.836 81.788,84.836 82.296,84.836 82.804,84.836 83.312,84.836 76.708,85.344 77.216,85.344 77.724,85.344 78.232,85.344 78.74,85.344 79.248,85.344 79.756,85.344 80.264,85.344 80.772,85.344 81.28,85.344 81.788,85.344 82.296,85.344 82.804,85.344 83.312,85.344
AUXFB: R4.2 R5.1 U2.3 | length 3.2
  Bottom Layer w0.254: U2.3@78.679,70.682 78.679,70.038 79.292,69.425 R5.1@79.292,69.088 R4.2@80.601,69.088
BATFB: D3.2 R20.1 R22.2 U8.20 | length 8.2
  Bottom Layer w0.178: D3.2@86.868,79.793 R20.1@86.868,81.236 R22.2@88.392,81.236 88.392,80.772 88.519,80.645 91.821,80.645 92.113,80.937 U8.20@92.963,80.937
BST1: C10.1 D2.2 U1.22 | length 3.7
  Top Layer w0.254: v1(82.677,66.167) 83.185,66.167 83.476,65.876 D2.2@83.476,65.151
  Bottom Layer w0.254: U1.22@81.76,65.373 81.76,65.861 82.169,66.27 ; C10.1@82.169,66.885 82.169,66.27 ; v1@82.574,66.27 82.169,66.27
BST2: C9.1 D1.2 U1.15 | length 2.9
  Top Layer w0.254: D1.2@77.433,65.151 77.433,65.749 v1(77.851,66.167)
  Bottom Layer w0.254: C9.1@77.851,66.885 v1(77.851,66.167) 78.26,65.758 U1.15@78.26,65.373
COMP: C32.2 R7.1 U1.11 | length 3.4
  Bottom Layer w0.208: R7.1@75.355,64.516 C32.2@75.355,63.373 76.073,63.373 76.323,63.123 U1.11@77.51,63.123
DCDCRUN: R18.1 U1.6 U8.2 | length 52.5
  Signal Layer 2 w0.178: v1(79.248,60.579) 79.248,61.341 79.883,61.976 82.042,61.976 82.55,62.484 82.55,63.881 83.947,65.278 88.646,65.278 88.9,65.024 88.93,65.024 89.438,64.516 91.567,64.516 93.472,66.421 94.869,66.421 95.631,67.183 95.631,67.818 96.139,68.326 96.774,68.326 97.536,69.088 97.536,74.041 98.679,75.184 100.554,75.184 101.355,75.986 101.355,82.541 100.33,83.566 94.996,83.566 94.107,82.677 v1(94.107,82.55)
  Bottom Layer w0.178: R18.1@92.412,83.439 92.412,82.721 92.583,82.55 v1(94.107,82.55) 94.088,82.531 U8.2@94.088,81.662
  Bottom Layer w0.254: v1@79.26,60.591 U1.6@79.26,61.373
DCEN: R19.2 U2.4 U8.19 | length 20.2
  Signal Layer 2 w0.254: v1(78.679,73.082) 80.448,73.082 81.153,73.787 87.63,73.787 88.138,74.295 88.138,77.724 v1(88.265,77.851)
  Bottom Layer w0.178: R19.2@88.392,78.95 88.856,78.95 89.027,79.121 89.027,79.629 89.662,80.264 91.974,80.264 92.247,80.537 U8.19@92.963,80.537
  Bottom Layer w0.254: v1(88.265,77.851) 88.392,77.978 R19.2@88.392,78.95
DSCK: pad.0@99.314,77.978 U8.14 | length 9.9
  Signal Layer 2 w0.178: v1(93.345,77.851) 93.345,76.454 93.599,76.2 95.377,76.2 96.012,76.835 96.012,77.216 96.774,77.978 v1(99.314,77.978) v1@99.187,77.851
  Bottom Layer w0.178: v1(93.345,77.851) 93.802,77.851 94.077,78.126 94.077,78.601 U8.14@94.088,78.612
DSDA: pad.2@99.314,79.248 U8.4 | length 7.7
  Signal Layer 2 w0.178: v1(94.888,82.531) 94.888,80.753 95.631,80.01 96.363,80.01 97.134,79.239 97.75,79.239 97.76,79.248 v1(99.314,79.248)
  Bottom Layer w0.178: U8.4@94.888,81.662 v1(94.888,82.531)
FSW: R9.1 U1.1 | length 1.9
  Bottom Layer w0.208: U1.1@81.76,61.373 82.518,61.373 82.76,61.131 R9.1@83.566,61.131
GH1: Q3.1 Q4.1 U1.23 | length 50.2
  Top Layer w0.381: Q3.1@89.662,93.809 v1(89.662,94.361) ; v1(93.853,94.996) 94.996,94.996 95.504,94.488 Q4.1@95.504,93.809
  Signal Layer 2 w0.381: v1(82.51,65.111) 82.553,65.111 83.205,65.762 90.587,65.762 92.303,67.478 92.303,81.706 97.282,86.684 97.282,89.281 94.869,91.694 94.869,94.615 94.488,94.996 v1(93.853,94.996) 93.218,94.361 v1(89.662,94.361)
  Bottom Layer w0.254: U1.23@82.51,64.623 v1(82.51,65.111)
GH2: Q1.1 Q2.1 U1.14 | length 46.5
  Top Layer w0.508: Q1.1@68.199,93.809 v1(68.199,94.234) ; Q2.1@74.041,93.809 v1(74.041,94.234)
  Signal Layer 2 w0.381: v1(74.041,94.234) 73.357,94.918 66.645,94.918 66.245,94.518 66.245,93.521 67.183,92.583 67.818,92.583 68.326,92.075 68.326,90.413 66.435,88.522 66.435,86.484 71.882,81.037 71.882,76.327 76.706,71.503 76.706,66.8 v1(76.454,66.548)
  Signal Layer 2 w0.508: v1(68.199,94.234) 68.199,94.742
  Bottom Layer w0.254: v1(76.454,66.548) 76.756,66.246 76.756,65.048 77.18,64.623 U1.14@77.51,64.623
GL1: Q3.8 Q4.8 U1.21 | length 38.9
  Top Layer w0.381: v1(89.662,87.63) Q3.8@89.662,88.849 ; v1(95.504,87.63) Q4.8@95.504,88.849
  Signal Layer 2 w0.381: v1(81.407,66.294) 82.296,67.183 82.296,68.072 83.058,68.834 89.916,68.834 90.732,69.65 90.732,72.336 89.662,73.406 v1(89.662,87.63)
  Bottom Layer w0.254: U1.21@81.26,65.373 81.26,66.147 v1(81.407,66.294)
  Bottom Layer w0.381: v1(89.662,87.63) v1(95.504,87.63)
GL2: Q1.8 Q2.8 U1.16 | length 32.4
  Top Layer w0.381: v1(68.199,87.757) Q1.8@68.199,88.849 ; v1(74.041,87.757) Q2.8@74.041,88.849
  Signal Layer 2 w0.381: v1(68.199,87.757) v1(74.041,87.757) 74.041,76.844 78.613,72.272 v1(78.613,66.294)
  Bottom Layer w0.254: v1(78.613,66.294) 78.76,66.147 U1.16@78.76,65.373
GLED: pad.4@92.456,63.5 U8.12 U10.1 | length 16.9
  Top Layer w0.254: v1(92.075,66.167) 92.456,65.786 pad.4@92.456,63.5
  Bottom Layer w0.178: U10.1@93.49,75.423 94.346,75.423 94.874,75.951 94.874,76.393 94.878,76.397 94.878,77.303 94.874,77.308 94.874,78.123 94.877,78.126 94.877,78.601 U8.12@94.888,78.612
  Bottom Layer w0.254: v1(92.075,66.167) 92.075,66.445 93.49,67.86 U10.1@93.49,75.423
GND: C1.2 C2.2 C3.2 C4.2 C6.1 C7.1 C8.1 C11.1 C12.2 C13.1 C14.1 C15.1 C16.1 C17.1 C18.1 C19.1 C20.1 C21.1 C22.1 C23.1 C24.1 C25.1 C26.1 C27.1 C28.1 C29.1 C30.1 C31.2 C32.1 C33.2 C34.1 C35.1 C36.1 C38.2 C39.1 C40.1 C41.1 C42.1 C43.1 C44.1 C45.1 C46.1 C47.1 C48.1 C49.1 C50.1 C51.1 C52.1 C53.1 C54.1 C55.2 C56.1 C57.1 D3.1 D5.K pad.0@65.532,90.297 pad.0@71.755,90.424 pad.0@87.122,90.297 pad.0@92.202,90.297 pad.2@99.314,81.788 pad.4@90.424,62.357 Q1.10 Q2.10 Q3.10 Q4.10 R5.2 R8.2 R9.2 R11.1 R13.0 R18.2 R19.1 R22.1 R23.1 R26.1 R30.2 U1.5 U1.19 U1.26 U1.29 U2.2 U3.2 U3.4 U4.3 U4.4 U5.1 U5.2 U6.2 U7.3 U7.4 U8.3 U8.21 U9.2 U10.2 U11.2 | length 62.7
  Top Layer w0.178: v1(85.852,64.643) 85.852,65.151 86.277,65.576 C45.1@86.868,65.576 87.293,65.576 87.459,65.742 C44.1@87.459,66.929 ; v1(86.36,62.865) U9.2@86.36,63.482 ; v1(87.63,62.401) C43.1@88.265,62.401
  Top Layer w0.254: U5.1@72.753,61.834 73.645,61.834 73.66,61.849 73.66,62.484 ; U5.2@72.753,62.484 73.66,62.484 ; C36.1@74.676,64.218 74.676,62.972 v1(74.505,62.801) 74.231,62.801 73.914,62.484 73.66,62.484 ; C38.2@76.073,62.948 78.022,62.948 78.486,62.484 ; U6.2@78.486,61.411 78.486,62.484 ; v1(78.994,62.484) 78.486,62.484
  Top Layer w0.305: v1(69.85,65.278) U11.2@70.503,65.278
  Signal Layer 2 w0.508: v1(79.629,71.374) 79.946,71.057 v1(79.946,67.735)
  Bottom Layer w0.178: v1(87.884,79.756) 88.348,79.756 R19.1@88.392,79.8 ; v1(88.392,82.55) R22.1@88.392,82.086 R23.1@89.789,82.086 ; R26.1@91.103,77.597 v1(91.103,78.061) ; v1(94.488,80.137) U8.3@94.488,81.662
  Bottom Layer w0.254: C56.1@72.644,65.576 73.185,65.576 73.356,65.405 73.356,59.232 73.533,59.055 ; R8.2@74.505,62.23 v1(74.505,62.801) C32.1@74.505,63.373 ; C31.2@75.355,65.659 75.736,66.04 v1(75.946,66.04) ; 76.327,60.071 C33.2@76.791,60.071 ; 76.962,69.469 77.089,69.469 77.47,69.088 R5.2@78.442,69.088 ; C8.1@79.375,67.735 v1(79.946,67.735) C7.1@80.518,67.735 ; U1.5@79.76,61.373 U1.29@79.76,63.123 ; U1.29@80.26,63.123 U1.26@82.51,63.123 ; U1.29@80.26,63.623 U1.19@80.26,65.373 ; R11.1@81.832,60.071 82.677,60.071 v1(82.804,60.198) 82.887,60.281 R9.2@83.566,60.281 ; R18.2@93.262,83.312 C41.1@94.444,83.312
  Bottom Layer w0.305: C55.2@68.572,69.469 69.295,70.192 69.295,71.016 U3.2@69.342,71.063 ; C2.2@75.86,67.986 75.479,67.986 76.962,69.469 77.216,69.723 C6.1@77.216,70.187 ; U10.2@93.49,76.073 94.234,76.073 94.361,76.2 v1(94.361,77.089) ; C46.1@97.536,79.165 v1(97.536,79.756) ; C47.1@97.536,83.737 97.536,86.106
  Bottom Layer w0.508: U2.2@79.629,70.682 v1(79.629,71.374) ; C40.1@86.868,86.531 86.868,89.154 ; C40.1@86.885,86.548 U7.3@88.335,86.548 U7.4@90.735,86.548 92.276,86.548 C39.1@92.456,86.368
  other v1: 75.057,57.658 75.946,57.658 76.835,57.658 77.597,57.658 78.359,57.658 79.248,57.658 80.137,57.658 81.026,57.658 81.915,57.658 82.804,57.785 83.693,57.912 74.295,58.039 84.582,58.039 85.598,58.293 73.533,58.547 86.487,58.547 72.771,58.801 87.376,58.801 72.009,59.055 88.265,59.182 71.374,59.309 76.581,59.563 89.154,59.563 70.612,59.69 69.85,60.071 90.043,60.071 85.217,60.325 69.088,60.452 90.932,60.452 68.453,60.833 91.821,60.96 67.818,61.214 92.583,61.468 67.183,61.595 93.345,61.976 66.548,62.103 90.424,62.357 93.98,62.484 65.913,62.611 80.391,62.865 80.899,62.865 81.407,62.865 65.405,63.119 94.742,63.119 80.391,63.373 80.899,63.373 81.407,63.373 64.897,63.5 95.377,63.754 64.262,63.881 80.391,63.881 80.899,63.881 81.407,63.881 63.754,64.389 96.012,64.389 63.246,65.024 96.774,65.151 62.738,65.532 97.536,66.04 62.23,66.294 98.044,66.802 61.595,67.056 90.551,67.691 98.679,67.691 61.214,67.818 70.739,68.072 60.833,68.453 99.187,68.58 60.452,69.088 60.96,69.088 61.468,69.088 99.695,69.469 60.198,69.596 60.706,69.596 61.214,69.596 59.944,70.104 60.452,70.104 60.96,70.104 100.076,70.231 59.563,70.612 60.071,70.612 60.706,70.612 100.457,70.993 59.309,71.12 59.817,71.12 60.452,71.12 59.182,71.628 59.69,71.628 60.198,71.628 100.838,71.882 59.055,72.136 59.563,72.136 60.071,72.136 68.58,72.136 69.088,72.136 58.928,72.644 59.436,72.644 59.944,72.644 101.219,72.898 58.801,73.406 101.473,73.787 58.674,73.914 58.42,74.549 101.727,74.676 58.293,75.184 101.981,75.565 58.166,76.073 100.838,76.2 102.108,76.581 59.309,76.708 59.817,76.708 60.325,76.708 58.039,76.835 86.614,76.835 87.122,76.835 59.309,77.216 59.817,77.216 60.325,77.216 86.614,77.343 87.122,77.343 102.235,77.597 59.309,77.724 59.817,77.724 60.325,77.724 57.912,77.851 86.614,77.851 87.122,77.851 95.885,78.105 59.309,78.232 59.817,78.232 60.325,78.232 57.785,78.74 59.309,78.74 59.817,78.74 60.325,78.74 102.235,78.74 59.309,79.248 59.817,79.248 60.325,79.248 57.785,79.756 59.309,79.756 59.817,79.756 60.325,79.756 60.833,79.756 61.341,79.756 61.849,79.756 62.357,79.756 62.865,79.756 63.373,79.756 102.235,79.883 66.294,80.01 59.309,80.264 59.817,80.264 60.325,80.264 60.833,80.264 61.341,80.264 61.849,80.264 62.357,80.264 62.865,80.264 63.373,80.264 63.881,80.264 57.785,80.645 59.309,80.772 59.817,80.772 60.325,80.772 60.833,80.772 61.341,80.772 61.849,80.772 62.357,80.772 62.865,80.772 63.373,80.772 63.881,80.772 69.088,80.899 69.596,80.899 102.235,81.026 59.309,81.28 59.817,81.28 60.325,81.28 60.833,81.28 61.341,81.28 61.849,81.28 62.357,81.28 62.865,81.28 63.373,81.28 63.881,81.28 69.088,81.407 69.596,81.407 57.785,81.534 59.309,81.788 59.817,81.788 60.325,81.788 60.833,81.788 61.341,81.788 61.849,81.788 62.357,81.788 62.865,81.788 63.373,81.788 63.881,81.788 99.314,81.788 102.235,82.042 57.912,82.296 59.309,82.296 59.817,82.296 60.325,82.296 60.833,82.296 61.341,82.296 61.849,82.296 62.357,82.296 62.865,82.296 63.373,82.296 63.881,82.296 59.309,82.804 59.817,82.804 60.325,82.804 60.833,82.804 61.341,82.804 61.849,82.804 62.357,82.804 62.865,82.804 63.373,82.804 63.881,82.804 58.039,83.312 102.108,83.312 58.166,84.074 101.854,84.455 58.293,84.963 101.6,85.598 58.42,85.725 58.674,86.36 101.346,86.614 58.928,87.249 100.965,87.63 59.182,88.138 98.044,88.138 98.552,88.138 99.06,88.138 99.568,88.138 98.044,88.646 98.552,88.646 99.06,88.646 99.568,88.646 100.584,88.646 59.436,88.9 98.044,89.154 98.552,89.154 99.06,89.154 99.568,89.154 64.008,89.281 64.516,89.281 65.024,89.281 65.532,89.281 66.04,89.281 85.598,89.281 86.106,89.281 86.614,89.281 87.122,89.281 87.63,89.281 88.138,89.281 88.646,89.281 91.694,89.281 92.202,89.281 92.71,89.281 93.218,89.281 93.726,89.281 94.234,89.281 61.849,89.408 62.357,89.408 62.865,89.408 63.373,89.408 70.231,89.408 70.739,89.408 71.247,89.408 71.755,89.408 72.263,89.408 72.771,89.408 75.311,89.408 75.819,89.408 76.327,89.408 76.835,89.408 77.343,89.408 77.851,89.408 78.359,89.408 78.867,89.408 79.375,89.408 79.883,89.408 80.391,89.408 80.899,89.408 81.407,89.408 81.915,89.408 82.423,89.408 82.931,89.408 83.439,89.408 83.947,89.408 84.455,89.408 84.963,89.408 59.69,89.535 100.076,89.535 98.044,89.662 98.552,89.662 99.06,89.662 64.008,89.789 64.516,89.789 66.548,89.789 85.598,89.789 86.106,89.789 88.138,89.789 88.646,89.789 93.218,89.789 93.726,89.789 94.234,89.789 61.849,89.916 62.357,89.916 62.865,89.916 63.373,89.916 70.231,89.916 70.739,89.916 72.771,89.916 75.311,89.916 75.819,89.916 76.327,89.916 76.835,89.916 77.343,89.916 77.851,89.916 78.359,89.916 78.867,89.916 79.375,89.916 79.883,89.916 80.391,89.916 80.899,89.916 81.407,89.916 81.915,89.916 82.423,89.916 82.931,89.916 83.439,89.916 83.947,89.916 84.455,89.916 84.963,89.916 59.944,90.043 97.536,90.17 98.044,90.17 98.552,90.17 99.06,90.17 64.008,90.297 64.516,90.297 66.548,90.297 67.056,90.297 85.598,90.297 86.106,90.297 88.138,90.297 88.646,90.297 93.218,90.297 93.726,90.297 94.234,90.297 99.695,90.297 61.849,90.424 62.357,90.424 62.865,90.424 63.373,90.424 70.231,90.424 70.739,90.424 72.771,90.424 73.279,90.424 73.787,90.424 60.198,90.678 97.536,90.678 98.044,90.678 98.552,90.678 99.06,90.678 64.008,90.805 64.516,90.805 66.548,90.805 67.056,90.805 67.564,90.805 85.598,90.805 86.106,90.805 88.138,90.805 88.646,90.805 89.154,90.805 89.662,90.805 93.218,90.805 93.726,90.805 61.849,90.932 62.357,90.932 62.865,90.932 63.373,90.932 70.231,90.932 70.739,90.932 72.771,90.932 73.279,90.932 73.787,90.932 74.803,90.932 75.311,90.932 75.819,90.932 76.327,90.932 76.835,90.932 77.343,90.932 77.851,90.932 78.359,90.932 78.867,90.932 79.375,90.932 79.883,90.932 80.391,90.932 80.899,90.932 81.407,90.932 81.915,90.932 82.423,90.932 82.931,90.932 83.439,90.932 83.947,90.932 84.455,90.932 84.963,90.932 64.008,91.313 64.516,91.313 65.024,91.313 65.532,91.313 66.04,91.313 66.548,91.313 67.056,91.313 67.564,91.313 85.598,91.313 86.106,91.313 86.614,91.313 87.122,91.313 87.63,91.313 88.138,91.313 88.646,91.313 89.154,91.313 89.662,91.313 91.694,91.313 92.202,91.313 92.71,91.313 93.218,91.313 99.314,91.313 60.452,91.44 62.357,91.44 62.865,91.44 63.373,91.44 70.231,91.44 70.739,91.44 71.247,91.44 71.755,91.44 72.263,91.44 72.771,91.44 73.279,91.44 73.787,91.44 74.803,91.44 75.311,91.44 75.819,91.44 76.327,91.44 76.835,91.44 77.343,91.44 77.851,91.44 78.359,91.44 78.867,91.44 79.375,91.44 79.883,91.44 80.391,91.44 80.899,91.44 81.407,91.44 81.915,91.44 82.423,91.44 82.931,91.44 83.439,91.44 83.947,91.44 84.455,91.44 84.963,91.44 98.806,92.075 60.833,92.202 61.468,92.71 98.171,92.837 62.103,93.218 97.663,93.726 62.611,93.853 97.028,94.488 63.246,94.615 63.881,95.377 96.266,95.377 64.389,96.012 95.504,96.012 65.024,96.647 94.869,96.647 65.659,97.282 94.234,97.282 66.421,97.917 93.472,97.917 67.183,98.425 92.583,98.552 67.945,98.933 91.567,99.187 68.834,99.441 90.805,99.695 69.596,99.822 89.916,100.203 70.485,100.33 75.692,100.33 76.2,100.33 76.708,100.33 77.216,100.33 77.724,100.33 78.232,100.33 78.74,100.33 79.248,100.33 79.756,100.33 80.264,100.33 80.772,100.33 81.28,100.33 81.788,100.33 82.296,100.33 82.804,100.33 83.312,100.33 83.82,100.33 84.328,100.33 84.836,100.33 85.344,100.33 71.374,100.584 88.9,100.584 75.692,100.838 76.2,100.838 76.708,100.838 77.216,100.838 77.724,100.838 78.232,100.838 78.74,100.838 79.248,100.838 79.756,100.838 80.264,100.838 80.772,100.838 81.28,100.838 81.788,100.838 82.296,100.838 82.804,100.838 83.312,100.838 83.82,100.838 84.328,100.838 84.836,100.838 85.344,100.838 72.263,100.965 88.138,101.092 73.279,101.346 76.2,101.346 76.708,101.346 77.216,101.346 77.724,101.346 78.232,101.346 78.74,101.346 79.248,101.346 79.756,101.346 80.264,101.346 80.772,101.346 81.28,101.346 81.788,101.346 82.296,101.346 82.804,101.346 83.312,101.346 83.82,101.346 84.328,101.346 84.836,101.346 87.376,101.473 74.549,101.727 86.614,101.727 75.565,101.981 85.852,101.981 76.581,102.235 84.963,102.235 84.201,102.362 77.47,102.489 83.439,102.489 78.359,102.616 79.248,102.616 80.137,102.616 81.026,102.616 81.915,102.616 82.677,102.616
HPATH: Q5.1 Q5.2 Q5.3 R12.2 R13.1 | length 4.7
  Signal Layer 2 w0.254: v1(63.654,79.148) 64.443,78.359 v1(66.421,78.359)
  Bottom Layer w0.254: R13.1@63.654,78.054 v1(63.654,79.148) ; v1(66.421,78.359) 66.885,78.359 R12.2@66.929,78.403
ILED: U5.6 U6.3 | length 14.7
  Top Layer w0.254: U5.6@70.503,61.834 71.389,61.834 71.628,61.595 v1(71.628,61.341) v1@71.662,61.307 ; U6.3@79.436,61.538 79.436,61.439 80.039,61.439 80.137,61.341 80.137,60.071 80.518,59.69 v1(80.518,59.309)
  Signal Layer 2 w0.254: v1(71.628,61.341) 72.517,60.452 73.787,60.452 75.381,58.858 79.813,58.858 80.264,59.309 v1(80.518,59.309)
INJ: R14.1 U11.3 U11.4 | length 12.2
  Top Layer w0.254: U11.4@72.753,64.628 U11.3@70.503,64.628 69.835,64.628 69.596,64.389 69.596,61.341 70.231,60.706 71.501,60.706 72.009,60.198 73.406,60.198 74.041,59.563 R14.1@74.759,59.563
IS1_N: R1.3 U1.28 | length 15.4
  Top Layer w0.254: v1(83.566,62.357) 83.754,62.545 84.135,62.545 84.963,63.373 84.963,65.786 87.027,67.85 88.463,67.85 88.99,68.377 R1.3@93.904,68.377
  Bottom Layer w0.254: U1.28@82.51,62.123 83.332,62.123 v1(83.566,62.357)
IS1_P: R1.2 U1.27 | length 9.3
  Top Layer w0.254: v1(83.566,63.215) 83.754,63.027 83.935,63.027 84.48,63.573 84.48,65.986 85.979,67.484 85.979,68.072 86.24,68.333 87.459,68.333 R1.2@87.503,68.377
  Bottom Layer w0.254: U1.27@82.51,62.623 82.974,62.623 v1(83.566,63.215)
IS2_N: R2.2 U1.8 | length 17.3
  Top Layer w0.208: R2.2@66.167,68.504 68.783,68.504 v1(69.215,68.072)
  Signal Layer 2 w0.208: v1(69.215,68.072) 69.215,68.04 70.175,67.081 73.018,67.081 74.168,65.931 74.168,64.661 75.038,63.791 75.038,61.723 75.511,61.25 76.545,61.25 v1(76.708,61.087)
  Bottom Layer w0.208: v1(76.708,61.087) 76.994,61.373 U1.8@78.26,61.373
IS2_P: R2.3 U1.9 | length 15.2
  Top Layer w0.208: v1(69.977,68.072) 70.51,68.605 70.96,68.605 71.06,68.504 R2.3@72.568,68.504
  Signal Layer 2 w0.208: v1(69.977,68.072) 70.532,67.517 73.199,67.517 74.605,66.111 74.605,64.841 75.367,64.079 75.474,63.972 75.474,61.904 75.692,61.686 76.545,61.686 v1(76.708,61.849)
  Bottom Layer w0.208: v1(76.708,61.849) 76.982,62.123 U1.9@77.51,62.123
IVCC: C8.2 D1.1 D2.1 U1.17 | length 5
  Top Layer w0.254: v1(79.673,66.885) 79.673,65.996 79.793,65.876 D1.1@79.793,65.151 D2.1@81.116,65.151
  Bottom Layer w0.254: U1.17@79.26,65.373 79.26,66.179 79.375,66.294 C8.2@79.375,66.885 v1(79.673,66.885)
KEY: pad.4@93.853,65.024 R27.1 U8.11 U10.6 | length 19.6
  Bottom Layer w0.178: U8.11@95.288,78.612 95.288,77.686 95.495,77.479 97.908,77.479 98.147,77.24 98.147,76.92 98.15,76.918 98.15,76.078 98.147,76.076 98.147,75.795 98,75.648 R27.1@97.536,75.648 97.536,75.632 96.841,75.632 96.632,75.423 U10.6@95.74,75.423
  Bottom Layer w0.254: v1(93.853,65.024) 94.234,65.405 94.234,74.676 94.981,75.423 U10.6@95.74,75.423
LARGEIS_N: R13.2 U5.5 | length 26.8
  Top Layer w0.254: U5.5@70.503,62.484 71.501,62.484 v1(71.755,62.738)
  Bottom Layer w0.254: R13.2@65.354,84.455 65.354,82.22 65.786,81.788 67.484,81.788 68.301,80.972 68.301,77.634 71.857,74.078 71.857,63.681 71.755,63.58 v1(71.755,62.738)